# Altium PCB 800U R3N3_LED_V1.0.PcbDoc (part 1 of 2)
Units mm, origin at the board's own origin, x right, y up, seen from the top; angles counter-clockwise.
Board outline 308.48 x 220.22 mm, 4 copper layers (Top Layer, GND, Mid-Layer 2, Bottom Layer); 88 components, 70 nets, 229 pads, 84 vias.
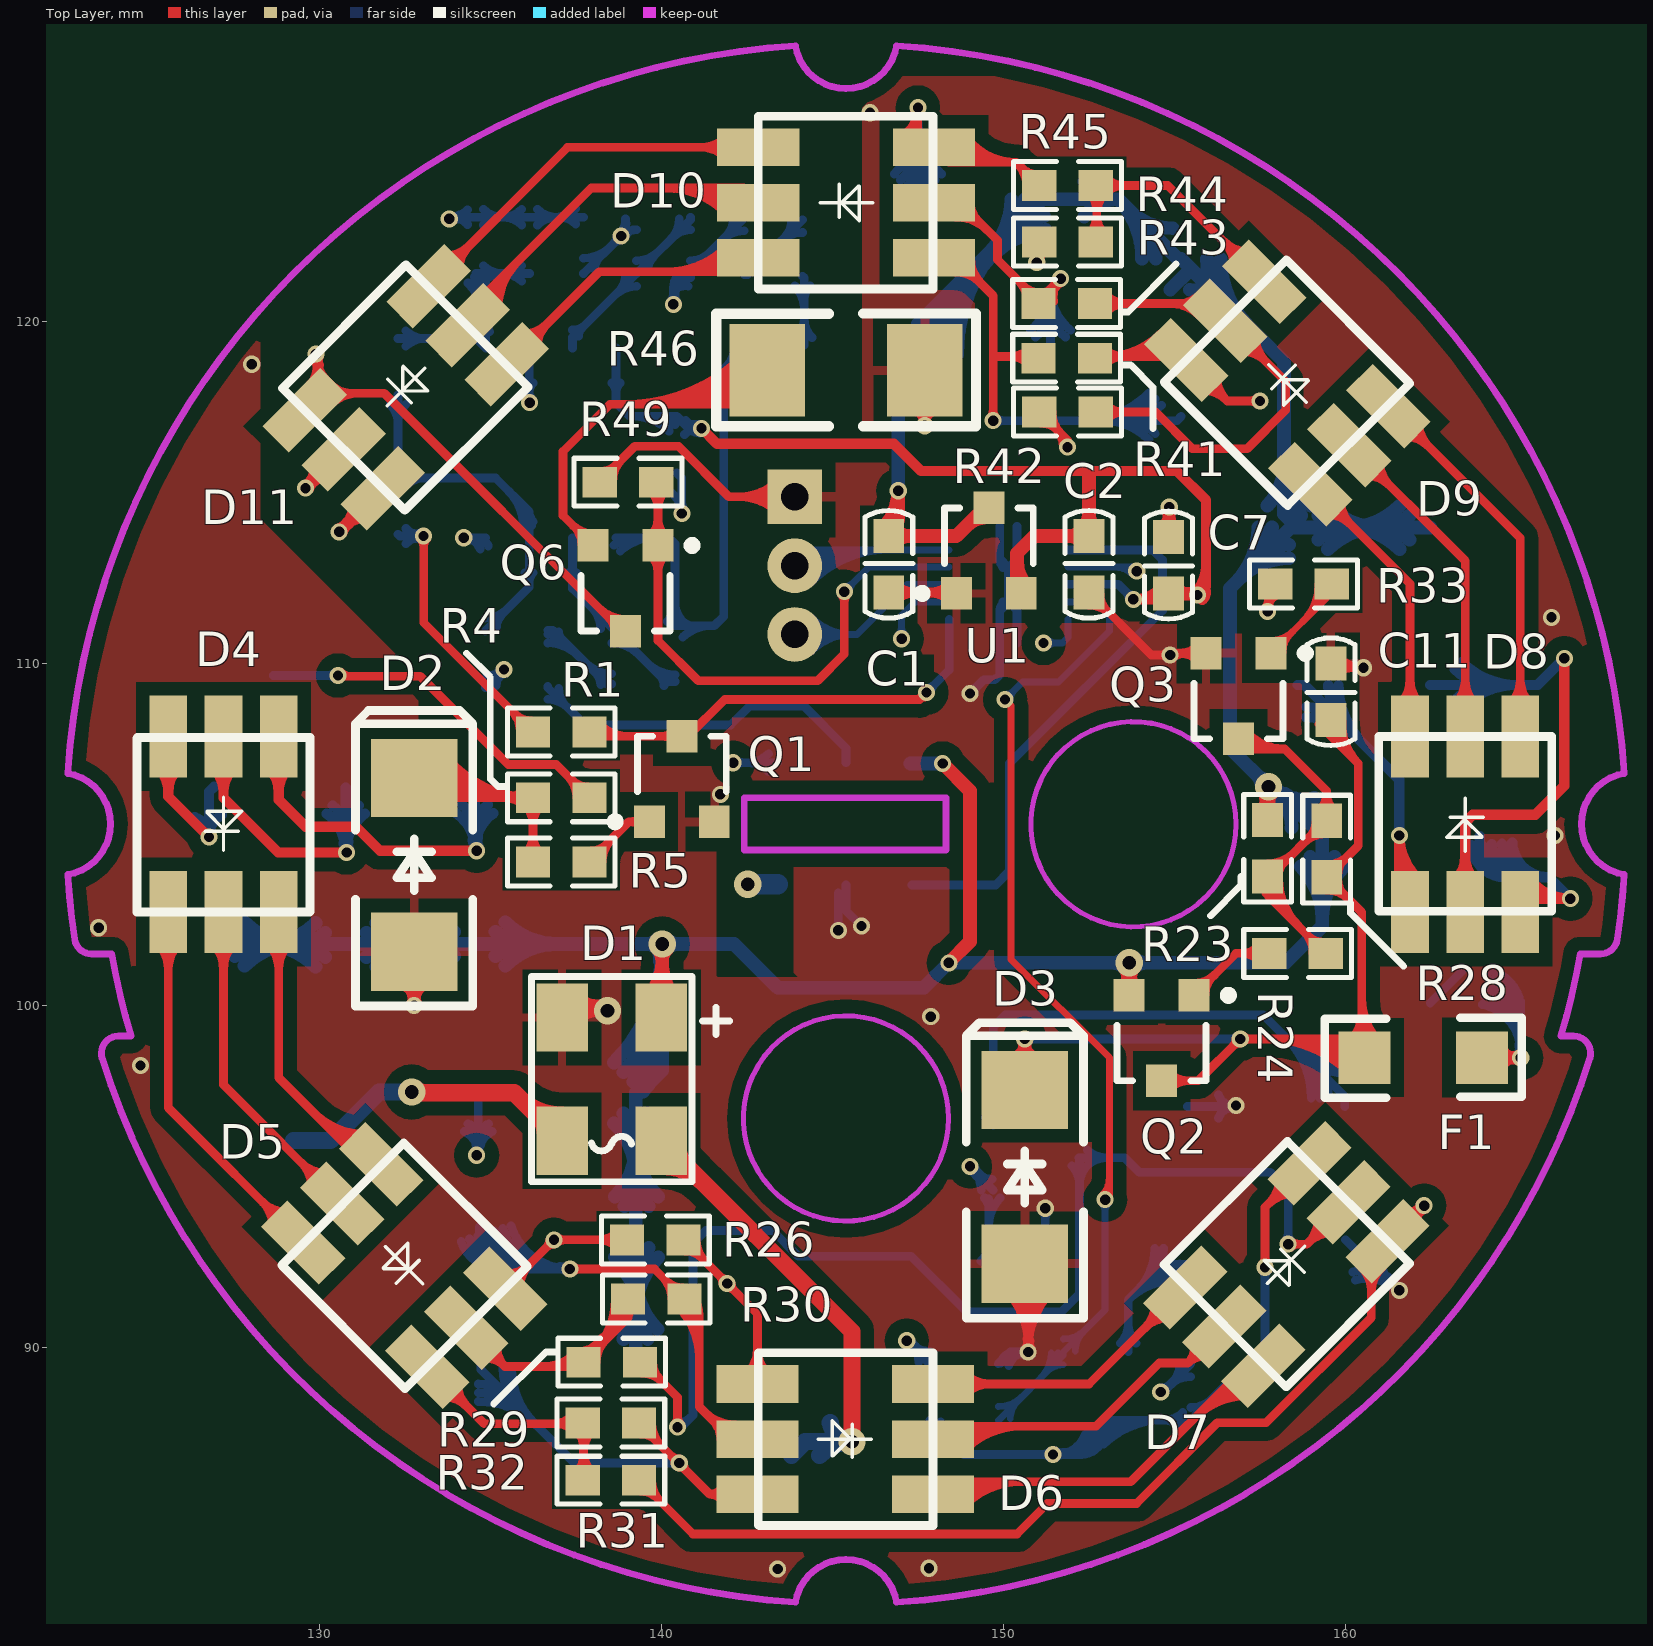
[diagram p0: Top Layer view]
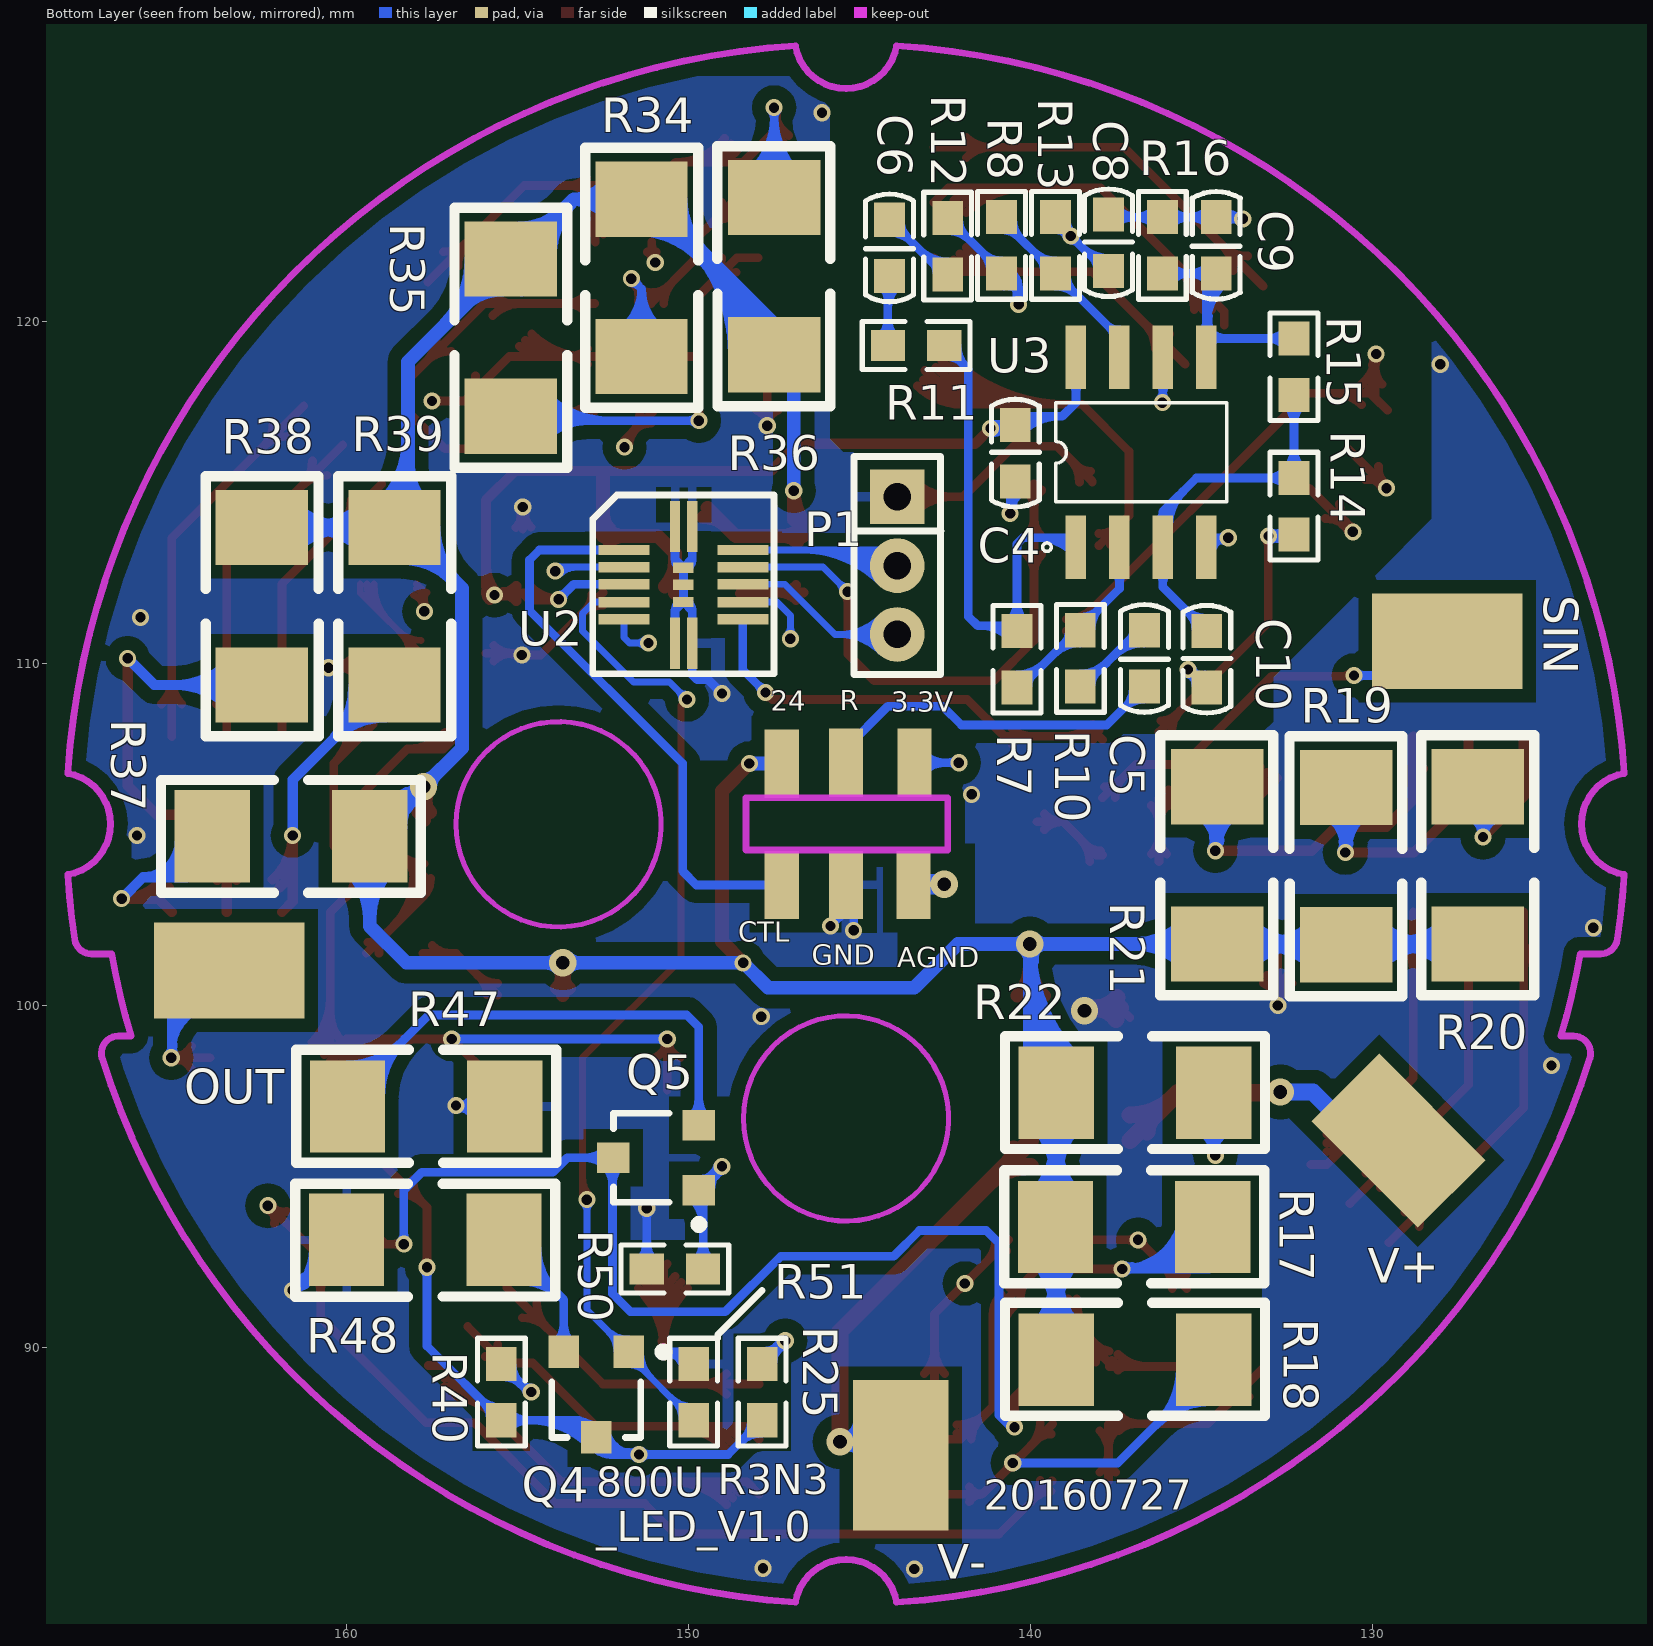
[diagram p1: Bottom Layer view, seen from below]
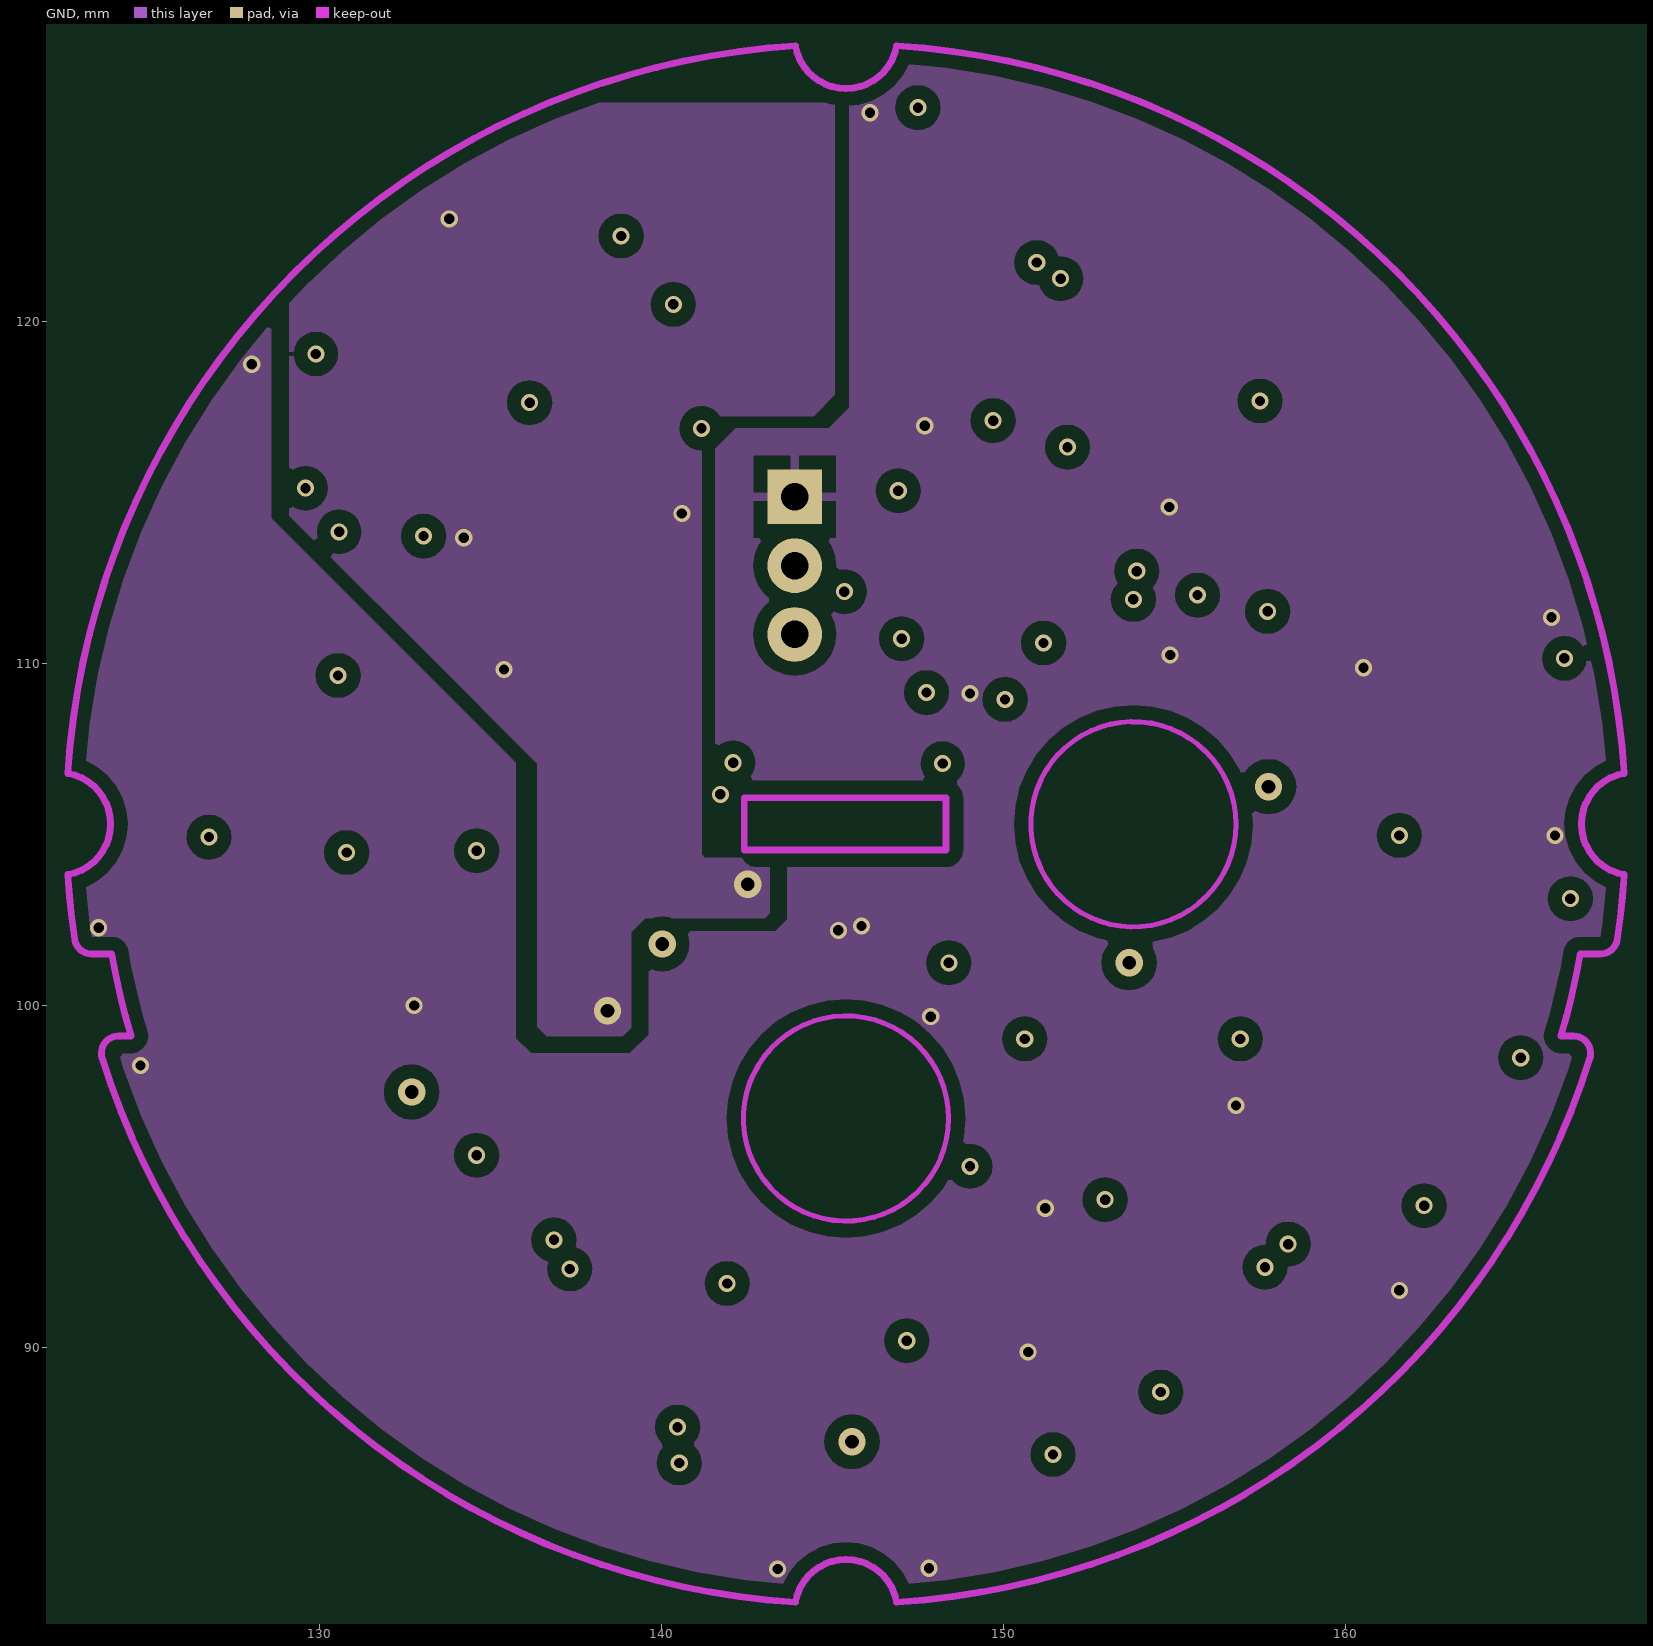
[diagram p2: GND]
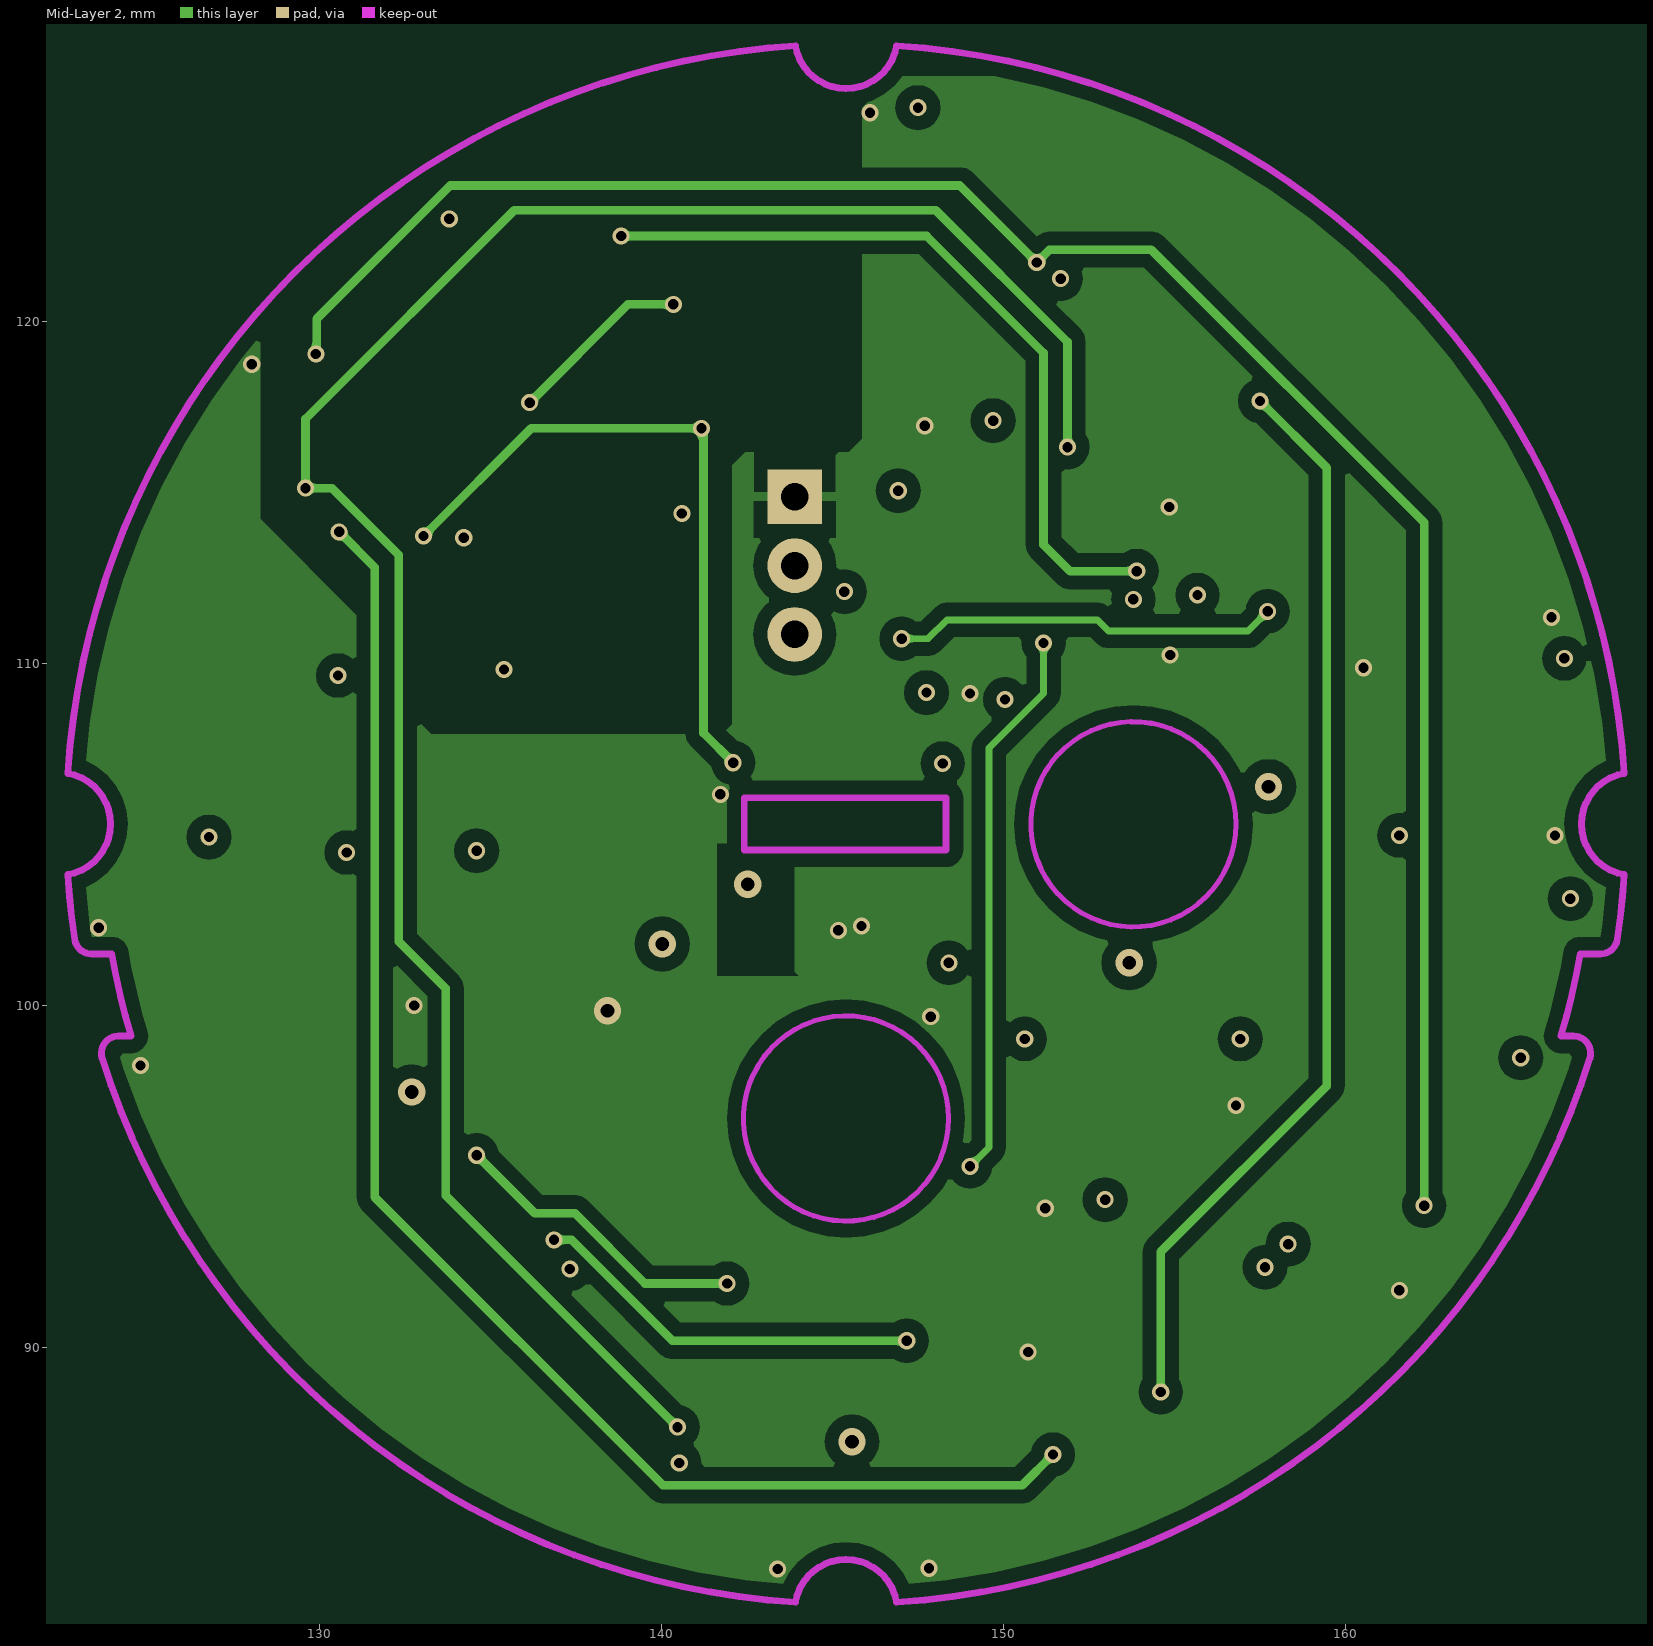
[diagram p3: Mid-Layer 2]

## Layer stack, top to bottom
Top Layer: signal copper 0.0356
Dielectric: core 0.32, FR-4, Dk 4.8
GND: signal copper 0.0356
Dielectric: prepreg 0.32, FR-4, Dk 4.8
Mid-Layer 2: signal copper 0.0356
Dielectric: core 0.32, FR-4, Dk 4.8
Bottom Layer: signal copper 0.0356

## Board outline
-7.366,215.265 301.117,215.265 301.117,-4.191 300.736,-4.572 -6.985,-4.572 -7.366,-4.953

## Design rules (kind name [scope] priority, off if disabled: settings)
Clearance Clearance_GND [InPolygon] p1: gap=0.4
Clearance Clearance_PAD [ISpad and incomponent('U2')] p2: gap=0.17
Clearance [All] p3: gap=0.2
PolygonConnect [ISvia] p1: connectstyle=Direct reliefconductorwidth=0.254 reliefentries=4 polygonreliefangle="90 Angle"
RoutingVias [All] p1: holewidth=0.3 width=0.5 viastyle="Through Hole" minholewidth=0.3 minwidth=0.5 maxholewidth=0.4 maxwidth=0.8
SilkscreenOverComponentPads [All] p1: minsilkscreentomaskgap=0.1
SolderMaskExpansion [All] p1: expansion=0.102
Width [All] p1: maxlimit=0.6 minlimit=0.2 preferedwidth=0.254 midlayer1_minwidth=0.254 midlayer1_maxwidth=0.254 midlayer2_prefwidth=0.2 minimp=50.000000 maximp=50.000000 favimp=50.000000
27 further rules are at their usual default settings.

## Components (designator, comment, footprint, x,y, rotation, side; value= is the part's Value field where it differs from the comment)
3.3V "" HOLE_SMD#1 143.4,107.1 r0 bottom
24 "" HOLE_SMD#1 147.275,107.075 r180 bottom (schematic designator 1)
AGND "" HOLE_SMD#1 143.425,103.525 r180 bottom (schematic designator GND)
C1 "1uF/50V" C0603 146.65,113.725 r270 top
C2 "1uF/50V" C0603 152.5,113.725 r270 top
C4 "C106" C0603 140.45,116.975 r270 bottom
C5 "C104" C0603 136.675,109.325 r90 bottom
C6 "C104" C0603 144.125,121.325 r90 bottom
C7 "105" C0603 154.825,112.05 r90 top
C8 "C104" C0603 137.725,123.125 r270 bottom
C9 "C104" C0603 134.575,121.4 r90 bottom
C10 "C104" C0603 134.85,110.95 r270 bottom
C11 "104" C0603 159.575,108.35 r90 top
CTL "" HOLE_SMD#1 147.275,103.525 r180 bottom (schematic designator LED_CTL)
D1 "LX10M" "桥堆 3.8*3.5" 138.55,97.85 r0 top
D2 "TVS36V" HSMA 132.775,101.575 r90 top
D3 "TVS36V" HSMA 150.625,92.45 r90 top
D4 "5050RGB" 5050RGB 127.2,105.3 r90 top
D5 "5050RGB" 5050RGB 132.481,92.4 r135 top
D6 "5050RGB" 5050RGB 145.375,87.325 r180 top
D7 "5050RGB" 5050RGB 158.275,92.431 r225 top
D8 "5050RGB" 5050RGB 163.5,105.3 r270 top
D9 "5050RGB" 5050RGB 158.3,118.2 r315 top
D10 "5050RGB" 5050RGB 145.4,123.475 r0 top
D11 "5050RGB" 5050RGB 132.525,118.075 r45 top
F1 "SMD1206P016" 1206 162.275,98.475 r0 top
GND "" HOLE_SMD#1 145.4,103.525 r180 bottom
OUT "" HOLE_SMD#2 163.425,101.025 r180 bottom
P1 "3P 2.0mm" SIP3 143.9,115.4 r0 bottom
Q1 "MMBT5551" SOT-23 140.6,106.625 r0 top
Q2 "S8550" SOT-23 154.625,99.05 r180 top
Q3 "贴片三极管" SOT-23 156.875,109.05 r180 top
Q4 "MMBT5551" SOT-23 152.7,88.625 r0 bottom
Q5 "MMBT5551" SOT-23 150.95,95.55 r90 bottom
Q6 "MMBT5551" SOT-23 138.95,112.2 r180 top
R "" HOLE_SMD#1 145.4,107.1 r180 bottom (schematic designator LED_R)
R1 "10K" R0603 137.9,108 r180 top
R4 "SMD1206P016" R0603 136.25,106.075 r0 top
R5 "10K" R0603 136.25,104.2 r0 top
R7 "" R0603 140.4,109.3 r90 bottom
R8 "" R0603 140.85,121.4 r90 bottom
R10 "" R0603 138.55,109.325 r90 bottom
R11 "" R0603 142.525,119.3 r0 bottom
R12 "" R0603 142.425,121.375 r90 bottom
R13 "" R0603 139.275,121.4 r90 bottom
R14 "" R0603 132.3,113.775 r90 bottom
R15 "" R0603 132.3,117.85 r90 bottom
R16 "" R0603 136.15,123.05 r270 bottom
R17 "" 2010 136.975,93.525 r180 bottom
R18 "" 2010 136.95,89.65 r180 bottom
R19 "300" 2010 130.775,104.075 r90 bottom
R20 "510" 2010 126.925,104.1 r90 bottom
R21 "300" 2010 134.55,104.1 r90 bottom
R22 "" 2010 136.95,97.45 r180 bottom
R23 "10K" R0603 157.725,103.775 r90 top
R24 "10K" R0603 159.425,101.525 r180 top
R25 "" R0603 147.85,89.525 r270 bottom
R26 "0R" R0603 139,93.15 r0 top
R28 "0R" R0603 159.45,105.4 r270 top
R29 "" R0603 137.725,89.575 r0 top
R30 "0R" R0603 139.025,91.425 r0 top
R31 "" R0603 137.7,86.125 r0 top
R32 "0R" R0603 137.7,87.8 r0 top
R33 "2K" R0603 159.6,112.325 r180 top
R34 "" 2010 151.375,121.275 r270 bottom
R35 "" 2010 155.2,119.525 r270 bottom
R36 "" 2010 147.5,121.325 r90 bottom
R37 "510" 2010 161.625,104.95 r0 bottom
R38 "300" 2010 162.475,111.675 r270 bottom
R39 "300" 2010 158.6,111.675 r270 bottom
R40 "" R0603 155.475,89.525 r270 bottom
R41 "0R" R0603 152.675,118.925 r180 top
R42 "" R0603 152.7,117.35 r180 top
R43 "0R" R0603 152.675,120.525 r180 top
R44 "" R0603 152.7,122.325 r180 top
R45 "0R" R0603 152.7,123.975 r180 top
R46 "150" 2010 145.4,118.575 r0 top
R47 "150" 2010 157.675,97.05 r180 bottom
R48 "150" 2010 157.7,93.15 r0 bottom
R49 "10K" R0603 139.85,115.3 r180 top
R50 "10K" R0603 149.575,92.3 r0 bottom
R51 "10K" R0603 149.85,87.875 r90 bottom
SIN "" HOLE_SMD#2 127.825,110.65 r180 bottom
U1 "Volt Reg" SOT-23 149.575,113.3 r0 top
U2 "C8051F300" QFN-11 150.15,112.3 r180 bottom locked
U3 "OPA2338" SO-8 138.675,113.4 r0 bottom
V+ "" HOLE_SMD#2 129.25,96.05 r45 bottom
V- "" HOLE_SMD#2 143.8,86.85 r270 bottom

## Footprints (in the part's own frame and the unit in brackets; to place one, negate y for a bottom-side part, rotate by r counter-clockwise, add the part's x,y. Pads: shape width x height; smd on the part's side, far side on the other; paste and mask are expansions set on the pad)
1206 [mil]
  rect 60x60 smd: 1(-67.5,0) 2(67.5,0)
  silkscreen extent -114,-46 114,46
2010 [mm]
  rect 2.2x2.7 smd: 1(-2.3,0) 2(2.3,0)
  silkscreen extent -3.8,-1.64 3.8,1.66
5050RGB [mm]
  rect 2.4x1.1 smd: 1(-2.565,1.613) 2(-2.565,0) 3(-2.565,-1.613) 4(2.565,-1.613) 5(2.565,0) 6(2.565,1.613)
  silkscreen extent -2.56,-2.53 2.54,2.53
C0603 [mm]
  rect 1x0.9 smd: 1(0,0) 2(1.65,0)
  silkscreen extent -0.75,-0.7 2.4,0.7
HOLE_SMD#1 [mm]
  rect 1x2 smd: 1(0,0)
HOLE_SMD#2 [mm]
  rect 4.4x2.8 smd: 1(0,0)
HSMA [mil]
  rect 90x100 smd: 1(0,0) 2(200,0)
  silkscreen extent -63,-68 278,68
QFN-11 [mm]
  rect 1.5x0.305 smd: 1(-1.737,1.018) 2(-1.737,0.518) 3(-1.737,0.018) 4(-1.737,-0.507) 5(-1.737,-1.007) 6(1.737,-1.007) 7(1.737,-0.507) 8(1.737,0.018) 9(1.737,0.518) 10(1.737,1.018)
  rect 0.305x1.5 smd: 11(-0.248,-1.705) 11(-0.248,1.705) 11(0.26,-1.705) 11(0.26,1.705)
  rect 0.6x0.3 smd: 11(0,-0.5) 11(0,0) 11(0,0.5)
  silkscreen extent -2.65,-2.6 2.65,2.63
R0603 [mm]
  rect 1x0.9 smd: 1(0,0) 2(1.65,0)
  silkscreen extent -0.75,-0.7 2.4,0.7
SIP3 [mm]
  rect 1.6x1.6 hole 0.8: 1(0,0.525)
  round 1.6 hole 0.8: 2(0,2.54) 3(0,4.55)
  silkscreen extent -1.28,-0.65 1.27,5.72
SO-8 [mm]
  rect 0.6x1.85 smd: 1(0,0) 2(-1.27,0) 3(-2.54,0) 4(-3.81,0) 5(-3.81,-5.55) 6(-2.54,-5.55) 7(-1.27,-5.55) 8(0,-5.55)
  silkscreen extent -4.41,-4.23 0.98,0.12
SOT-23 [mm] "SOT-23;"
  rect 0.9x0.95 smd: 1(-0.95,-1.25) 2(0.95,-1.25) 3(0,1.25)
  silkscreen extent -2.07,-1.37 1.3,1.25
"桥堆 3.8*3.5" [mm]
  rect 1.5x2 smd: 1(1.45,1.8) 2(1.45,-1.8) 3(-1.45,-1.8) 4(-1.45,1.8)
  silkscreen extent -2.35,-3 3.45,3

## Part data
3.3V 24 AGND CTL GND OUT R SIN V+ V-: library part 焊
C1 C2 C7 C11: library part Cap, "贴"
C4 C5 C6 C8 C9 C10: library part Cap, "Capacitor"
D2 D3: library part "D Schottky", "贴"
D4 D5 D6 D7 D8 D9 D10 D11: "贴"
F1 R4 R7 R8 R10 R11 R12 R13 R14 R15 R16: library part "Res Semi", "Semiconductor Resistor"
P1: library part MHDR1X3, "插"
Q1 Q4 Q5 Q6: library part NPN, "贴片NPN三极管"
Q2: "贴片PNP三极管"
Q3: library part NPN, "NPN三极管"
R1 R5 R17 R18 R19 R20 R21 R22 R23 R24 R25 R26 R28 R29 R30 R31 R32 R33 R34 R35 R36 R37 R38 R39 R40 R41 R42 R43 R44 R45 R46 R47 R48 R49 R50 R51: library part "Res Semi", "贴"
U1: "Voltage Regulator"
U3: library part LM833D, "Dual Low Noise, Audio Amplifier"

## Via types
v1: diameter 0.5, hole 0.3, Top Layer to Bottom Layer, 77 vias
v2: diameter 0.8, hole 0.4, Top Layer to Bottom Layer, 7 vias

## Nets (pads, with @x,y where several pads share a name; then routed paths per layer and width w, separated by ;. In a path a pad name is that pad's centre, name@x,y a point inside that pad or via, vN(x,y) a via of type N, cw(c..) or ccw(c..) an arc to the next point about the centre after c; other vN are vias at no path point)
3.3V: 3.3V.1 C2.1 C4.1 C7.1 R1.2 R14.1 U1.2 U2.3 U3.8 | length 82.2
  Top Layer w0.254: v1@132.963,113.638 cw(c132.753,113.428) 133.05,113.428 cw(c133.347,113.428) v1@133.137,113.638 ; v1(133.05,113.725) 133.05,111.2 R1.2@136.25,108 ; 135.613,108.637 cw(c134.977,108) R1.2@135.877,108 ; 135.734,108.516 ccw(c136.2,108.982) R1.2@136.2,108.323
  Top Layer w0.3: v1(141.175,116.875) 141.625,116.425 146.8,116.425 147.6,115.625 155.075,115.625 155.925,114.775 155.925,112.25 v1(155.675,112) 155.625,112.05 C7.1@154.825,112.05 154.65,111.875 v1(153.8,111.875) ccw(c153.8,113.023) C7.1@154.613,112.212 ; C7.1@155.037,111.838 cw(c155.549,111.326) 155.549,112.05 cw(c155.549,112.774) C7.1@155.037,112.262 ; 155.313,112.05 cw(c155.313,111.638) v1@155.604,111.929 ; 155.322,111.989 cw(c155.404,111.684) v1@155.61,111.924 ; 155.409,112.088 cw(c155.333,111.802) v1@155.588,111.95 ; v1@155.604,112.071 ccw(c154.83,112.845) 155.925,112.845 ; v1@155.816,111.859 ccw(c155.554,112.121) 155.925,112.121
  Top Layer w0.4: U1.2@150.4,112.05 150.4,113.225 150.9,113.725 C2.1@152.5,113.725 152.5,115.525 ; 150.4,112.98 ccw(c151.43,112.98) U1.2@150.702,112.252 ; C2.1@152.323,113.548 ccw(c151.896,113.121) 151.896,113.725 ccw(c151.896,114.329) C2.1@152.323,113.902 ; C2.1@152.323,113.952 ccw(c151.896,114.379) 152.5,114.379 ccw(c153.104,114.379) C2.1@152.677,113.952
  Mid-Layer 2 w0.254: v1(133.05,113.725) 136.2,116.875 v1(141.175,116.875) 141.231,116.819 141.231,107.969 v1(142.1,107.1) ; v1@133.05,113.848 ccw(c133.05,114.145) 133.26,113.935 ccw(c133.47,113.725) v1@133.173,113.725 ; v1@141.088,116.962 cw(c140.878,117.172) 140.878,116.875 cw(c140.878,116.578) 141.088,116.788 cw(c140.742,116.442) 141.231,116.442 ; v1@141.977,107.1 ccw(c141.68,107.1) 141.89,107.31 ccw(c142.1,107.52) v1@142.1,107.223
  Bottom Layer w0.25: U2.3@151.887,112.318 153.357,112.318 v1(153.8,111.875) ; v1@153.675,111.875 ccw(c153.373,111.875) 153.587,112.088 ccw(c153.8,112.302) v1@153.8,112
  Bottom Layer w0.254: R14.1@132.3,113.775 132.35,113.725 v1(133.05,113.725) ; R14.1@132.535,113.503 cw(c133.05,113.016) v1(133.05,113.725) ; R14.1@132.535,113.947 ccw(c133.05,114.434) v1(133.05,113.725) ; v1@132.943,113.664 ccw(c132.686,113.515) 132.763,113.802 ccw(c132.84,114.089) v1@132.989,113.832 ; v1@132.943,113.786 cw(c132.686,113.935) 132.763,113.648 cw(c132.84,113.361) v1@132.989,113.618 ; v1@132.963,113.638 ccw(c132.753,113.428) 132.753,113.725 ccw(c132.753,114.022) v1@132.963,113.812 ; U3.8@138.553,118.203 cw(c138.257,117.907) 138.675,117.907 cw(c139.093,117.907) U3.8@138.797,118.203 ; U3.8@138.675,119.225 138.675,117.625 139.075,117.225 C4.1@140.45,117.225 ; 139.187,117.225 cw(c139.187,115.762) C4.1@140.222,116.797 ; 139.801,117.225 cw(c139.801,116.376) C4.1@140.401,116.976 ; C4.1@140.678,116.697 cw(c141.109,116.266) v1@141.109,116.875 ; C4.1@140.713,117.113 ccw(c141.175,117.443) v1(141.175,116.875) 140.8,116.875 C4.1@140.45,117.225 ; C4.1@140.802,116.873 ccw(c141.124,117.195) v1@141.196,116.746 ; C4.1@140.844,116.804 cw(c140.936,116.461) v1@141.114,116.768 ; 140.924,116.825 ccw(c140.862,117.056) v1@141.068,116.937 ; v1@141.068,116.814 ccw(c140.816,116.671) 140.891,116.951 ccw(c140.966,117.231) v1@141.113,116.981 ; v1@141.088,116.788 ccw(c140.878,116.578) 140.878,116.875 ccw(c140.878,117.172) v1@141.088,116.962 ; v1@141.156,116.996 cw(c141.027,117.801) C4.1@140.45,117.225 ; v1(142.1,107.1) 3.3V.1@143.4,107.1 ; v1@142.187,107.013 cw(c142.397,106.803) 142.397,107.1 cw(c142.397,107.397) v1@142.187,107.187 ; 3.3V.1@143.136,106.836 ccw(c142.5,106.2) 142.5,107.1 ccw(c142.5,108) 3.3V.1@143.136,107.364
+24V: 24.1 C1.1 D1.1 Q2.2 R17.1 R18.1 R19.1 R20.1 R21.1 R22.1 R23.2 R34.1 R35.1 R36.1 R37.1 R38.1 R39.1 U1.3 | length 242.1
  Top Layer w0.4: D1.1@139.611,100.289 ccw(c138.612,101.288) 140.025,101.288 ; v2@139.884,101.659 cw(c139.542,101.317) 140.025,101.317 cw(c140.508,101.317) v2@140.166,101.659 ; D1.1@140,99.65 140.025,99.675 v2(140.025,101.8) ; 140.025,101.167 ccw(c141.267,101.167) D1.1@140.389,100.289 ; C1.1@146.473,113.952 ccw(c145.383,115.042) v1@146.925,115.042 ; C1.1@146.65,113.725 148.625,113.725 U1.3@149.45,114.55 ; C1.1@146.827,113.548 cw(c147.254,113.121) 147.254,113.725 cw(c147.254,114.329) C1.1@146.827,113.902 ; C1.1@146.925,114.2 v1(146.925,115.05) ; v1(148.225,107.075) 149.025,106.275 149.025,101.871 v1(148.404,101.25) ; 148.892,113.992 cw(c149.575,113.309) U1.3@149.575,114.275 ; Q2.2@153.498,100.502 ccw(c153.071,100.929) 153.675,100.929 ccw(c154.279,100.929) Q2.2@153.852,100.502 ; v2@153.534,101.109 cw(c153.192,100.767) 153.675,100.767 cw(c154.158,100.767) v2@153.816,101.109 ; v2@153.537,101.106 cw(c153.297,100.856) Q2.2@153.631,100.766 ; Q2.2@153.675,100.3 v2(153.675,101.25) ; Q2.2@153.719,100.766 cw(c154.053,100.856) v2@153.813,101.106 ; R23.2@157.548,105.652 ccw(c157.121,106.079) 157.725,106.079 ccw(c158.329,106.079) R23.2@157.902,105.652 ; v2@157.591,106.279 cw(c157.221,105.996) R23.2@157.671,105.876 ; v2@157.609,106.259 cw(c157.328,105.978) 157.725,105.978 ; R23.2@157.725,105.425 157.725,106.375 v2(157.75,106.4) ; R23.2@157.725,105.857 cw(c158.293,105.857) v2@157.891,106.259 ; 157.758,105.956 cw(c158.004,106.022) v2@157.862,106.234
  Bottom Layer w0.4: R20.1@126.925,101.8 R21.1@134.55,101.8 v2(140.025,101.8) ; R20.1@127.529,101.446 cw(c128.382,100.593) 128.382,101.8 cw(c128.382,103.007) R20.1@127.529,102.154 ; R20.1@127.811,101.164 cw(c129.348,99.627) 129.348,101.8 cw(c129.348,103.973) R20.1@127.811,102.436 ; 128.292,101.8 cw(c128.292,99.542) R19.1@129.889,101.139 ; 128.413,101.8 ccw(c128.413,103.887) R19.1@129.889,102.411 ; 129.258,101.8 cw(c129.258,100.508) R19.1@130.171,101.421 ; 129.378,101.8 ccw(c129.378,102.922) R19.1@130.171,102.129 ; R19.1@131.379,101.421 cw(c132.292,100.508) 132.292,101.8 ; R19.1@131.379,102.129 ccw(c132.172,102.922) 132.172,101.8 ; R19.1@131.661,101.139 cw(c133.258,99.542) R21.1@133.258,101.8 ; R19.1@131.661,102.411 ccw(c133.137,103.887) 133.137,101.8 ; R21.1@133.664,101.164 ccw(c132.127,99.627) 132.127,101.8 ccw(c132.127,103.973) R21.1@133.664,102.436 ; R21.1@133.946,101.446 ccw(c133.093,100.593) 133.093,101.8 ccw(c133.093,103.007) R21.1@133.946,102.154 ; R21.1@135.154,101.446 cw(c136.007,100.593) 136.007,101.8 cw(c136.007,103.007) R21.1@135.154,102.154 ; R21.1@135.436,101.164 cw(c136.973,99.627) 136.973,101.8 cw(c136.973,103.973) R21.1@135.436,102.436 ; R18.1@138.614,90.536 ccw(c137.077,92.073) 139.25,92.073 ccw(c141.423,92.073) R18.1@139.886,90.536 ; R22.1@138.614,96.564 cw(c137.077,95.027) 139.25,95.027 cw(c141.423,95.027) R22.1@139.886,96.564 ; R22.1@138.614,98.336 ccw(c135.206,101.744) v2@140.025,101.744 ; R17.1@138.639,92.639 cw(c137.163,91.163) 139.25,91.163 ; R17.1@138.639,94.411 ccw(c137.163,95.887) 139.25,95.887 ; R18.1@138.896,90.254 ccw(c138.043,91.107) 139.25,91.107 ccw(c140.457,91.107) R18.1@139.604,90.254 ; R22.1@138.896,96.846 cw(c138.043,95.993) 139.25,95.993 cw(c140.457,95.993) R22.1@139.604,96.846 ; R22.1@138.896,98.054 ccw(c136.172,100.778) 140.025,100.778 ; R17.1@138.921,92.921 cw(c138.128,92.128) 139.25,92.128 ; R17.1@138.921,94.129 ccw(c138.128,94.922) 139.25,94.922 ; R22.1@139.179,97.771 ccw(c137.138,99.812) 140.025,99.812 ; R18.1@139.25,89.725 R22.1@139.25,97.45 139.375,97.45 140.025,98.1 v2(140.025,101.8) ; 139.25,91.042 cw(c141.508,91.042) R17.1@139.911,92.639 ; 139.25,92.008 cw(c140.542,92.008) R17.1@139.629,92.921 ; 139.25,95.042 ccw(c140.542,95.042) R17.1@139.629,94.129 ; 139.25,96.008 ccw(c141.508,96.008) R17.1@139.911,94.411 ; R22.1@139.462,97.488 ccw(c138.103,98.847) 140.025,98.847 ; v2@139.863,101.683 cw(c139.446,101.383) 139.953,101.301 ; v2@139.884,101.941 cw(c139.542,102.283) 139.542,101.8 cw(c139.542,101.317) 139.884,101.659 cw(c139.542,101.317) 140.025,101.317 cw(c140.508,101.317) 140.166,101.659 cw(c140.508,101.317) 140.508,101.8 cw(c140.508,102.283) v2@140.166,101.941 ; 139.96,101.343 cw(c140.406,101.271) v2@140.142,101.638 ; v1(146.925,115.05) R36.1@146.925,118.45 ; 24.1@147.275,107.075 v1(148.225,107.075) ; R36.1@147.45,119.025 cw(c149.502,119.025) 148.051,120.476 ; R36.1@147.5,119.025 147.5,119.925 151.15,123.575 R34.1@151.375,123.575 153.35,123.575 ; R36.1@147.85,119.025 cw(c150.868,119.025) 148.734,121.159 ; R36.1@148.25,119.025 cw(c152.233,119.025) 149.417,121.842 ; R36.1@148.65,119.025 cw(c153.599,119.025) R34.1@150.1,122.525 ; 149.411,121.632 cw(c151.594,119.949) R34.1@151.24,122.682 ; 149.571,121.996 ccw(c147.992,123.575) R34.1@150.225,123.575 ; 149.631,122.056 cw(c151.125,120.563) R34.1@151.125,122.675 ; 149.915,122.285 ccw(c148.656,123.256) R34.1@150.232,123.46 ; 150.001,122.397 cw(c151.419,121.304) R34.1@151.189,123.079 ; R34.1@150.254,122.679 ccw(c149.358,123.575) R34.1@150.625,123.575 ; R34.1@150.314,122.739 cw(c151.125,121.928) R34.1@151.125,123.075 ; R34.1@152.363,123.06 cw(c153.35,122.372) 153.35,123.575 ; R34.1@152.363,124.09 ccw(c153.35,124.778) 153.35,123.575 ; v2@153.534,101.109 ccw(c153.192,100.767) 153.192,101.25 ccw(c153.192,101.733) v2@153.534,101.391 ; 153.67,123.255 ccw(c154.95,124.536) R35.1@154.95,122.725 ; v2@153.816,101.109 cw(c154.158,100.767) 154.158,101.25 cw(c154.158,101.733) v2@153.816,101.391 ; R35.1@154.016,122.909 cw(c152.967,121.86) R35.1@154.45,121.834 ; R35.1@154.05,121.841 ccw(c151.659,121.884) 153.35,123.575 ; R35.1@154.875,120.925 R35.1@155.487,121.537 ; R35.1@155.45,120.925 cw(c155.45,119.356) 156.56,120.465 ; R35.1@155.95,121.825 ccw(c157.761,121.825) 156.48,120.545 ; R35.1@156.35,121.825 ccw(c159.126,121.825) 157.163,119.862 ; 156.778,112.353 ccw(c155.156,113.975) R39.1@157.45,113.975 ; 156.899,112.474 cw(c158.35,111.023) R39.1@158.35,113.075 ; R39.1@157.461,113.036 ccw(c156.522,113.975) R39.1@157.85,113.975 ; v2@157.55,106.4 ccw(c157.067,106.4) 157.409,106.741 ccw(c157.75,107.083) v2@157.75,106.6 ; R39.1@157.582,113.157 cw(c158.35,112.389) R39.1@158.35,113.475 ; v2@157.698,106.207 cw(c157.448,105.274) R37.1@158.284,105.757 ; R39.1@157.714,114.611 ccw(c156.53,115.795) 158.204,115.795 ; v2@157.75,106.2 cw(c157.75,105.415) R37.1@158.305,105.97 ; v2@157.802,106.207 cw(c157.982,105.534) R37.1@158.33,106.137 ; v2@157.875,106.4 ccw(c158.772,107.297) R37.1@159.096,106.07 ; v2@157.965,106.31 cw(c156.856,105.2) R37.1@158.425,105.2 ; 158.204,115.535 ccw(c159.91,115.535) R39.1@158.704,114.329 ; 158.204,116.5 ccw(c160.875,116.5) R39.1@158.986,114.611 ; R37.1@158.367,105.908 ccw(c158.978,106.518) R37.1@159.198,105.683 ; R37.1@158.689,104.064 cw(c157.152,102.527) 159.325,102.527 cw(c161.498,102.527) R37.1@159.961,104.064 ; R37.1@158.971,104.346 cw(c158.118,103.493) 159.325,103.493 cw(c160.532,103.493) R37.1@159.679,104.346 ; R39.1@159.204,113.621 cw(c160.057,112.768) 160.057,113.975 cw(c160.057,115.182) R39.1@159.204,114.329 ; R39.1@159.486,113.339 cw(c161.023,111.802) 161.023,113.975 cw(c161.023,116.148) R39.1@159.486,114.611 ; R38.1@161.589,113.339 ccw(c160.052,111.802) 160.052,113.975 ccw(c160.052,116.148) R38.1@161.589,114.611 ; R38.1@161.871,113.621 ccw(c161.018,112.768) 161.018,113.975 ccw(c161.018,115.182) R38.1@161.871,114.329 ; R38.1@162.475,113.975 R39.1@158.6,113.975 ; v2(140.025,101.8) 142.125,101.8 143.4,100.525 147.679,100.525 v1(148.404,101.25) v2(153.675,101.25) 158.25,101.25 159.325,102.325 R37.1@159.325,104.95 157.875,106.4 v2(157.75,106.4) 156.625,107.525 156.625,112.2 158.4,113.975 R39.1@158.6,113.975 ; 153.35,123.575 155.1,121.825 R35.1@155.2,121.825 R35.1@155.488,121.538 ; R35.1@155.488,121.538 158.204,118.821 158.204,114.371 R39.1@158.6,113.975
ADCIN: R8.2 R13.1 U3.7 | length 9.6
  Bottom Layer w0.254: U3.7@137.405,119.225 137.405,119.53 R13.1@139.275,121.4 140.85,122.975 R8.2@140.85,123.05 ; U3.7@137.405,119.748 ccw(c137.405,120.274) 137.777,119.902 ; U3.7@137.578,119.575 cw(c137.887,119.575) U3.7@137.669,119.794 ; 138.638,120.763 cw(c139.275,120.127) R13.1@139.275,121.027 ; 138.759,120.884 ccw(c138.293,121.35) R13.1@138.952,121.35 ; R13.1@139.275,121.773 ccw(c139.275,122.673) 139.912,122.037 ; R13.1@139.598,121.45 cw(c140.257,121.45) 139.791,121.916 ; 140.281,122.406 ccw(c139.687,123) R8.2@140.527,123 ; 140.341,122.466 cw(c140.85,121.958) R8.2@140.85,122.677
ADCIN1: C8.2 R13.2 U2.2 | length 32.6
  Mid-Layer 2 w0.254: v1(138.825,122.5) 147.75,122.5 151.175,119.075 151.175,113.475 151.95,112.7 v1(153.9,112.7) ; v1@138.912,122.413 cw(c139.122,122.203) 139.122,122.5 cw(c139.122,122.797) v1@138.912,122.587 ; v1@153.813,112.613 ccw(c153.603,112.403) 153.603,112.7 ccw(c153.603,112.997) v1@153.813,112.787
  Bottom Layer w0.2: U2.2@151.887,112.818 v1@153.782,112.818 ; 153.252,112.818 cw(c153.252,112.052) v1@153.794,112.594
  Bottom Layer w0.254: C8.2@137.725,121.4 v1(138.825,122.5) ; C8.2@137.725,121.848 ccw(c137.725,122.93) 138.49,122.165 ; C8.2@138.048,121.525 cw(c138.526,121.525) 138.188,121.863 ; v1@138.688,122.363 ccw(c138.052,123) R13.2@138.952,123 ; v1@138.702,122.5 cw(c138.405,122.5) 138.615,122.29 cw(c138.825,122.08) v1@138.825,122.377 ; v1@138.809,122.484 cw(c139.275,122.018) R13.2@139.275,122.677 ; R13.2@138.907,122.742 ccw(c139.032,122.67) R13.2@138.92,122.578 ; R13.2@138.958,122.937 cw(c138.482,122.843) v1(138.825,122.5) ; R13.2@139.073,122.636 ccw(c139.211,122.396) 138.944,122.468 cw(c139.231,122.391) 139.082,122.648 cw(c138.934,122.906) 138.857,122.619 ccw(c138.939,122.925) R13.2@139.097,122.65 ; R13.2@139.267,122.677 ccw(c139.253,122.072) v1(138.825,122.5) ; v1@153.782,112.818 v1(153.9,112.7)
AGND: AGND.1
GND: C1.2 C2.2 C4.2 C7.2 C8.1 C9.2 C10.2 C11.2 D1.4 D2.1 D3.1 GND.1 P1.1 Q1.2 Q3.2 R16.1 R46.2 R47.2 R48.2 R49.2 R50.2 R51.2 U1.1 U2.11 U3.4 | length 107.5
  Top Layer w0.254: D2.1@132.356,100.649 cw(c132.062,100) v1(132.775,100) ; D2.1@132.461,100.881 cw(c132.24,100.394) 132.775,100.394 cw(c133.31,100.394) D2.1@133.089,100.881 ; v1@132.668,100.061 ccw(c132.411,100.21) 132.698,100.287 ccw(c132.985,100.364) v1@132.836,100.107 ; v1@132.688,100.087 ccw(c132.478,100.297) 132.775,100.297 ccw(c133.072,100.297) v1@132.862,100.087 ; v1@132.714,100.107 ccw(c132.565,100.364) 132.852,100.287 ccw(c133.139,100.21) v1@132.882,100.061 ; D2.1@132.775,101.575 v1(132.775,100) ; D2.1@133.194,100.649 ccw(c133.488,100) v1(132.775,100) ; D1.4@137.1,99.65 D1.4@137.375,99.925 ; R49.2@138.2,115.3 138.2,115.325 139.225,116.35 140.5,116.35 141.975,114.875 P1.1@143.9,114.875 ; R49.2@138.25,115.623 ccw(c138.25,116.222) 138.673,115.798 ; R49.2@138.573,115.3 cw(c139.534,115.3) 138.854,115.979 ; v1@140.563,114.35 v1(140.6,114.388) ; P1.1@143.424,114.399 ccw(c142.275,113.25) 142.275,114.875 ccw(c142.275,116.5) P1.1@143.424,115.351 ; P1.1@143.604,114.579 ccw(c142.888,113.863) 142.888,114.875 ccw(c142.888,115.887) P1.1@143.604,115.171 ; R46.2@147.376,117.407 cw(c147.215,116.95) v1(147.7,116.95) ; v1@147.602,117.024 ccw(c147.447,117.142) 147.635,117.193 ccw(c147.823,117.243) v1@147.748,117.063 ; v1@147.613,117.037 ccw(c147.403,117.247) 147.7,117.247 ccw(c147.997,117.247) v1@147.787,117.037 ; v1@147.652,117.063 ccw(c147.577,117.243) 147.765,117.193 ccw(c147.953,117.142) v1@147.798,117.024 ; R46.2@147.7,118.575 v1(147.7,116.95) ; R46.2@148.024,117.407 ccw(c148.185,116.95) v1(147.7,116.95) ; D3.1@150.034,91.732 cw(c148.364,90.062) v1@150.725,90.062 ; D3.1@150.213,91.911 cw(c148.978,90.676) 150.725,90.676 ; D3.1@150.393,92.091 cw(c149.591,91.289) 150.725,91.289 ; v1@150.624,89.945 ccw(c150.289,90.18) 150.692,90.251 ; D3.1@150.625,92.45 150.725,92.35 v1(150.725,89.875) ; v1@150.638,89.962 ccw(c150.428,90.172) 150.725,90.172 ccw(c151.022,90.172) v1@150.812,89.962 ; v1@150.656,89.977 ccw(c150.51,90.192) 150.765,90.143 ; v1@150.725,89.932 cw(c153.27,89.932) D3.1@151.47,91.732 ; 150.725,90.545 cw(c152.657,90.545) D3.1@151.291,91.911 ; 150.725,91.158 cw(c152.044,91.158) D3.1@151.111,92.091 ; 150.775,90.194 ccw(c151.103,90.131) v1@150.827,89.944 ; C2.2@152.5,111.702 cw(c152.5,110.802) 153.137,111.438 ; C2.2@152.5,112.075 154.325,110.25 v1(154.875,110.25) 154.925,110.3 Q3.2@155.925,110.3 ; C2.2@152.823,112.025 ccw(c153.482,112.025) 153.016,111.559 ; C7.2@154.6,113.981 ccw(c154.021,114.575) v1(154.85,114.575) ; v1@154.743,114.513 cw(c154.486,114.365) 154.773,114.288 cw(c155.06,114.211) v1@154.912,114.468 ; v1@154.763,114.488 cw(c154.553,114.278) 154.85,114.278 cw(c155.147,114.278) v1@154.937,114.488 ; v1@154.788,110.163 ccw(c154.578,109.953) 154.578,110.25 ccw(c154.578,110.547) v1@154.788,110.337 ; C7.2@154.85,113.925 v1(154.85,114.575) ; v1@154.85,114.469 ccw(c155.544,114.469) C7.2@155.053,113.978 ; 154.918,114.217 cw(c155.294,114.318) v1@154.957,114.514 ; v1@154.962,110.163 cw(c155.293,109.832) 155.293,110.3 ; Q3.2@155.697,110.072 ccw(c155.145,109.52) 155.145,110.3 ccw(c155.145,111.08) Q3.2@155.697,110.528 ; C11.2@159.575,109.875 v1(160.525,109.875) cw(c160.525,110.885) C11.2@159.805,110.177 ; C11.2@159.803,109.722 cw(c160.174,109.351) 160.174,109.875 ; v1@160.418,109.814 ccw(c160.161,109.665) 160.238,109.952 ccw(c160.315,110.239) v1@160.464,109.982 ; v1@160.438,109.788 ccw(c160.228,109.578) 160.228,109.875 ccw(c160.228,110.172) v1@160.438,109.962
  Top Layer w0.3: C1.2@146.65,112.075 148.475,112.075 U1.1@148.5,112.05 ; C1.2@146.862,111.863 cw(c147.374,111.351) 147.374,112.075 cw(c147.374,112.799) C1.2@146.862,112.287 ; U1.1@148.413,111.863 ccw(c147.901,111.351) 147.901,112.075 ccw(c147.901,112.799) U1.1@148.413,112.287
  Top Layer w0.5: D1.4@137.375,99.925 v2@138.15,99.925 ; D1.4@137.476,100.23 ccw(c138.15,100.823) 138.15,99.925 ccw(c138.15,99.113) D1.4@137.5,99.6
  Bottom Layer w0.254: v1(133.8,123) v1@133.85,123.05 ; v1@133.887,122.913 cw(c134.218,122.582) C9.2@134.218,123.05 ; v1@133.9,122.928 cw(c134.032,122.833) 134.074,122.99 ; v1@133.907,122.939 cw(c134.268,122.73) C9.2@134.16,123.133 ; v1@134.296,113.574 cw(c134.422,113.395) 134.479,113.607 cw(c134.536,113.819) v1@134.337,113.727 ; v1@134.312,113.588 cw(c134.522,113.378) 134.522,113.675 cw(c134.522,113.972) v1@134.312,113.762 ; C9.2@134.335,122.834 ccw(c133.85,122.398) v1@133.85,123.05 ; C9.2@134.335,123.266 cw(c133.85,123.702) v1@133.85,123.05 ; U3.4@134.588,113.675 cw(c134.588,113.299) U3.4@134.941,113.428 ; U3.4@134.702,113.341 ccw(c134.225,113.167) v1(134.225,113.675) U3.4@134.865,113.675 ; C9.2@134.803,122.822 cw(c135.355,122.27) 135.355,123.05 cw(c135.355,123.83) C9.2@134.803,123.278 ; C10.2@134.85,109.3 134.875,109.3 v1(135.4,109.825) cw(c135.002,110.223) C10.2@134.905,109.668 ; C10.2@135.173,109.35 cw(c135.772,109.35) v1@135.348,109.773 ; C10.2@135.212,109.538 cw(c135.525,109.357) v1@135.432,109.706 ; C10.2@135.258,109.617 ccw(c135.057,109.733) C10.2@135.281,109.793 ; v1@135.277,109.825 cw(c134.98,109.825) 135.19,109.615 cw(c135.4,109.405) v1@135.4,109.702 ; v1@135.281,109.855 cw(c135.005,109.925) 135.147,109.679 cw(c135.29,109.433) v1@135.367,109.707 ; R16.1@135.922,122.822 ccw(c135.37,122.27) 135.37,123.05 ccw(c135.37,123.83) R16.1@135.922,123.278 ; R16.1@136.378,122.822 cw(c136.93,122.27) 136.93,123.05 cw(c136.93,123.83) R16.1@136.378,123.278 ; 136.885,123.05 ccw(c136.885,123.915) C8.1@137.497,123.303 ; 137.006,123.05 cw(c137.006,122.356) C8.1@137.497,122.847 ; C8.1@137.725,123.05 C9.2@134.575,123.05 v1@133.85,123.05 ; C4.2@140.267,115.009 cw(c139.831,114.375) v1@140.6,114.375 ; C4.2@140.45,115.575 140.6,115.425 v1@140.6,114.388 ; v1@140.494,114.449 ccw(c140.247,114.592) 140.522,114.665 ; v1@140.513,114.474 ccw(c140.304,114.684) 140.6,114.684 ; 140.518,114.681 ccw(c140.816,114.761) v1@140.662,114.494 ; 140.6,114.685 ccw(c140.898,114.685) v1@140.687,114.474 ; v1(145.175,102.2) GND.1@145.175,103.3 ; GND.1@145.4,103.525 145.4,102.775 v1(145.85,102.325) ; v1(149.025,109.125) 149.425,109.525 149.75,109.525 149.889,109.664 U2.11@149.889,110.595 149.889,111.54 ; v1@149.025,109.248 ccw(c149.025,109.545) 149.235,109.335 ccw(c149.445,109.125) v1@149.148,109.125 ; R51.2@149.85,89.525 150.2,89.875 v1(150.725,89.875) ccw(c150.725,89.272) R51.2@150.155,89.469 ; 149.889,111.478 cw(c150.322,111.478) U2.11@150.016,111.784 ; 149.889,111.517 cw(c150.233,111.517) U2.11@150.015,111.782 ; 149.889,113.122 ccw(c150.322,113.122) U2.11@150.016,112.816 ; U2.11@149.889,114.005 149.889,113.06 ; R51.2@149.915,89.552 cw(c150.368,89.396) 150.368,89.875 ; U2.11@149.977,111.797 cw(c149.672,111.757) 149.89,111.54 ; U2.11@149.977,112.803 ccw(c149.672,112.843) 149.89,113.06 ; U2.11@150.013,112.819 cw(c150.187,113.06) 149.889,113.06 ; U2.11@150.284,111.784 cw(c150.009,111.509) 150.397,111.509 ; U2.11@150.284,112.816 ccw(c150.009,113.091) 150.397,113.091 ; U2.11@150.285,111.783 cw(c150.067,111.534) 150.397,111.534 ; U2.11@150.286,112.818 ccw(c150.106,113.047) 150.397,113.047 ; U2.11@150.323,111.796 ccw(c150.59,111.745) 150.397,111.553 ; U2.11@150.323,112.804 cw(c150.59,112.855) 150.397,113.047 ; U2.11@150.397,110.595 150.397,111.552 ; U2.11@150.397,114.005 150.397,113.047 ; v1@150.618,89.936 cw(c150.361,90.085) 150.438,89.798 cw(c150.515,89.511) v1@150.663,89.768 ; v1@150.638,89.788 ccw(c150.428,89.578) 150.428,89.875 ccw(c150.428,90.172) v1@150.638,89.962 ; R50.2@150.997,92.528 ccw(c150.445,93.08) 151.225,93.08 ccw(c152.005,93.08) R50.2@151.453,92.528 ; v1@151.138,93.988 cw(c150.928,93.778) 151.225,93.778 cw(c151.522,93.778) v1@151.312,93.988 ; R50.2@151.225,92.3 v1(151.225,94.075) ; R47.2@155.375,97.05 v1@156.775,97.05 ; R47.2@156.287,96.711 cw(c156.775,96.529) v1@156.775,97.05 ; R47.2@156.287,97.389 ccw(c156.775,97.571) v1@156.775,97.05 ; R47.2@156.443,97.05 ccw(c156.443,97.432) v1@156.713,97.162 ; 156.485,96.972 ccw(c156.398,97.297) v1@156.692,97.134 ; 156.559,96.992 cw(c156.62,96.764) v1@156.738,96.968 ; v1(156.8,97.075) v1@156.775,97.05 ; R48.2@160,93.15 v1@161.475,91.675 ; R48.2@160.212,92.213 cw(c160.495,91.292) 161.177,91.973 ; R48.2@160.286,91.97 cw(c160.636,90.836) v1@161.475,91.675 ; R48.2@160.719,92.896 ccw(c161.83,92.891) R48.2@161.044,92.106 ; R48.2@160.973,92.895 ccw(c162.687,92.887) v1@161.475,91.675 ; 161.188,91.841 ccw(c161.422,92.245) v1@161.543,91.794 ; 161.194,91.956 ccw(c161.575,92.336) v1@161.575,91.798 ; 161.247,92.07 ccw(c161.76,92.366) v1@161.607,91.794 ; v1(161.575,91.675) v1@161.475,91.675 ; 149.889,111.54 U2.11@150.15,111.8 ; 149.889,113.06 U2.11@150.15,112.8 ; U2.11@150.15,111.8 U2.11@150.15,112.8 ; U2.11@150.15,111.8 150.397,111.552 ; U2.11@150.15,112.8 150.397,113.047
  other v1: 143.4,83.525 147.825,83.55 124.775,98.25 147.875,99.675 123.55,102.275 166.125,104.975 141.725,106.175 166.025,111.35 128.025,118.75 146.1,126.1
  other v2: 138.425,99.85 142.525,103.55
INPUT: Q1.3 R1.1 U2.6 | length 16.7
  Top Layer w0.254: R1.1@137.9,107.775 138,107.875 140.775,107.875 141.85,108.95 147.55,108.95 v1(147.75,109.15) ; R1.1@137.999,108.049 ccw(c138.418,108.468) 138.418,107.875 ; R1.1@138.178,107.772 cw(c138.428,107.522) 138.428,107.875 ; R1.1@138.178,108.228 ccw(c139.032,109.082) 139.032,107.875 ; Q1.3@140.547,107.647 ccw(c139.995,107.095) 139.995,107.875 ccw(c139.995,108.655) Q1.3@140.547,108.103 ; v1@147.627,109.15 cw(c147.33,109.15) 147.54,108.94 cw(c147.75,108.73) v1@147.75,109.027
  Bottom Layer w0.254: v1(147.75,109.15) 148.412,109.813 U2.6@148.412,111.293 ; v1@147.75,109.273 ccw(c147.75,109.57) 147.96,109.36 ccw(c148.17,109.15) v1@147.873,109.15
LED_B: Q4.1 R51.1 U2.4 | length 35.6
  Top Layer w0.2: v1(150.05,108.95) 150.225,108.775 150.225,101.35 153.1,98.475 153.1,94.45 v1(152.975,94.325) ; v1@152.869,94.431 ccw(c152.311,94.989) 153.1,94.989
  Bottom Layer w0.2: R51.1@149.85,87.875 151.75,89.775 Q4.1@151.75,89.875 152.975,91.1 v1(152.975,94.325) ; R51.1@149.85,88.275 ccw(c149.85,89.241) 150.533,88.558 ; v1(150.05,108.95) 150.563,109.463 151.614,109.463 153.1,110.95 153.1,111.458 152.764,111.793 U2.4@151.887,111.793 ; v1@150.05,109.1 ccw(c150.05,109.462) 150.306,109.206 ccw(c150.562,108.95) v1@150.2,108.95 ; R51.1@150.2,87.925 cw(c150.924,87.925) 150.412,88.437 ; 151.099,89.124 ccw(c150.374,89.85) Q4.1@151.4,89.85 ; 151.281,89.306 cw(c151.75,88.836) Q4.1@151.75,89.5 ; Q4.1@151.441,89.466 ccw(c151.057,89.85) Q4.1@151.6,89.85 ; Q4.1@151.75,90.25 ccw(c151.75,91.155) 152.39,90.515 ; Q4.1@152.1,89.9 cw(c152.885,89.9) 152.33,90.455 ; v1@152.869,94.219 cw(c152.613,93.963) 152.975,93.963 cw(c153.337,93.963) v1@153.081,94.219
LED_G: Q5.1 R50.1 U2.5 | length 27.3
  Mid-Layer 2 w0.2: v1(149.025,95.3) 149.575,95.85 149.575,107.525 151.175,109.125 v1(151.175,110.6) ; v1@149.025,95.45 ccw(c149.025,95.812) 149.281,95.556 ccw(c149.537,95.3) v1@149.175,95.3 ; v1@151.069,110.494 cw(c150.813,110.238) 151.175,110.238 cw(c151.537,110.238) v1@151.281,110.494
  Bottom Layer w0.2: v1(151.175,110.6) 151.725,110.6 151.887,110.762 U2.5@151.887,111.293 ; v1@151.281,110.494 cw(c151.537,110.238) 151.537,110.6 cw(c151.537,110.962) v1@151.281,110.706
  Bottom Layer w0.254: v1@148.993,95.181 cw(c148.901,94.838) 149.209,95.016 ; v1@149.025,95.177 cw(c149.025,94.94) 149.192,95.108 ; v1(149.025,95.3) 149.025,95.275 Q5.1@149.7,94.6 ; v1@149.106,95.194 cw(c148.512,94.6) Q5.1@149.352,94.6 ; v1@149.144,95.268 ccw(c149.374,95.206) 149.168,95.087 ; v1@149.144,95.332 ccw(c149.673,95.474) Q5.1@149.399,94.999 ; v1@149.148,95.3 ccw(c149.505,95.3) Q5.1@149.253,95.047 ; v1@149.166,95.134 ccw(c149.675,95.642) Q5.1@149.675,94.923 ; R50.1@149.347,92.528 ccw(c148.795,93.08) 149.575,93.08 ccw(c150.355,93.08) R50.1@149.803,92.528 ; Q5.1@149.447,94.372 cw(c149.137,94.062) 149.575,94.062 ; R50.1@149.575,92.3 Q5.1@149.575,94.35 ; 149.575,93.579 cw(c150.696,93.579) Q5.1@149.903,94.372
LED_R: Q6.1 R49.1 U2.9 | length 20.7
  Top Layer w0.254: Q6.1@139.672,113.197 cw(c139.12,112.645) 139.9,112.645 cw(c140.68,112.645) Q6.1@140.128,113.197 ; Q6.1@139.672,113.703 ccw(c139.12,114.255) 139.9,114.255 ccw(c140.68,114.255) Q6.1@140.128,113.703 ; R49.1@139.672,115.072 cw(c139.12,114.52) 139.9,114.52 cw(c140.68,114.52) R49.1@140.128,115.072 ; R49.1@139.9,115.25 Q6.1@139.9,113.45 139.9,110.675 141.075,109.5 144.575,109.5 145.35,110.275 v1(145.35,112.1) ; v1@145.263,112.013 cw(c145.053,111.803) 145.35,111.803 cw(c145.647,111.803) v1@145.437,112.013
  Bottom Layer w0.2: v1(145.35,112.1) 146.068,112.818 U2.9@148.412,112.818 ; v1@145.35,112.25 ccw(c145.35,112.612) 145.606,112.356 ccw(c145.862,112.1) v1@145.5,112.1
LEDCTL: CTL.1 U2.1 | length 16.9
  Bottom Layer w0.254: CTL.1@147.325,103.525 149.775,103.525 150.175,103.925 150.175,107.075 154.65,111.55 154.65,113.025 154.357,113.318 U2.1@151.887,113.318
NetC5_1: C5.1 R.1 | length 11.6
  Bottom Layer w0.254: C5.1@136.675,108.952 cw(c136.675,108.112) 137.269,108.706 ; C5.1@136.675,109.325 136.675,109.3 137.775,108.2 142.025,108.2 142.575,108.75 144.175,108.75 145.4,107.525 R.1@145.4,107.1 ; C5.1@136.998,109.275 ccw(c137.717,109.275) 137.209,108.766
NetC5_2: C5.2 R10.1 | length 5.5
  Bottom Layer w0.254: C5.2@136.675,110.602 cw(c136.675,109.339) 137.568,110.232 ; C5.2@136.675,110.856 cw(c136.675,110.207) 137.134,110.666 ; C5.2@136.675,110.975 136.825,110.975 138.4,109.4 R10.1@138.55,109.4 ; C5.2@136.998,110.925 ccw(c137.295,110.925) C5.2@137.085,110.715 ; 137.785,110.015 ccw(c138.55,110.78) R10.1@138.55,109.698 ; 138.087,109.713 cw(c137.749,109.375) R10.1@138.227,109.375
NetC6_1: C6.1 R11.2 | length 4.5
  Bottom Layer w0.254: C6.1@143.897,121.047 cw(c143.225,120.375) 144.175,120.375 ; R11.2@143.947,119.528 ccw(c143.395,120.08) 144.175,120.08 ccw(c144.955,120.08) R11.2@144.403,119.528 ; C6.1@144.125,121.325 144.175,121.275 R11.2@144.175,119.3 ; 144.175,120.616 cw(c144.784,120.616) C6.1@144.353,121.047
NetC6_2: C6.2 R12.1 | length 4.8
  Bottom Layer w0.254: R12.1@142.425,121.375 142.525,121.375 C6.2@144.125,122.975 ; R12.1@142.425,121.748 ccw(c142.425,122.89) 143.232,122.082 ; R12.1@142.748,121.425 cw(c143.166,121.425) R12.1@142.87,121.72 ; 143.488,122.338 cw(c144.125,121.702) C6.2@144.125,122.602 ; 143.609,122.459 ccw(c143.143,122.925) C6.2@143.802,122.925
NetC9_1: C9.1 R15.2 R16.2 U3.5 | length 14.3
  Bottom Layer w0.254: R15.2@132.3,119.5 134.59,119.5 134.865,119.225 134.865,121.285 134.75,121.4 C9.1@134.575,121.4 R16.2@136.15,121.4 ; R15.2@132.528,119.272 cw(c133.08,118.72) 133.08,119.5 cw(c133.08,120.28) R15.2@132.528,119.728 ; 134.266,119.5 ccw(c134.266,120.174) 134.743,119.697 ccw(c134.447,119.993) 134.865,119.993 ccw(c135.283,119.993) U3.5@134.987,119.697 ; C9.1@134.347,121.122 cw(c133.095,119.87) U3.5@134.865,119.87 ; C9.1@134.526,121.301 cw(c133.708,120.483) 134.865,120.483 ; U3.5@134.719,119.668 ccw(c134.183,120.009) 134.803,120.147 ; C9.1@134.803,121.172 cw(c135.355,120.62) 135.355,121.4 cw(c135.355,122.18) C9.1@134.803,121.628 ; R16.2@135.922,121.172 ccw(c135.37,120.62) 135.37,121.4 ccw(c135.37,122.18) R16.2@135.922,121.628
NetC10_1: C10.1 R14.2 R15.1 U3.3 | length 18.6
  Bottom Layer w0.254: R14.2@132.072,115.703 ccw(c131.52,116.255) 132.3,116.255 ccw(c133.08,116.255) R14.2@132.528,115.703 ; R15.1@132.072,117.572 cw(c131.52,117.02) 132.3,117.02 cw(c133.08,117.02) R15.1@132.528,117.572 ; R15.1@132.3,117.85 R14.2@132.3,115.425 135.15,115.425 136.135,114.44 ; R14.2@132.528,115.197 cw(c133.08,114.645) 133.08,115.425 cw(c133.08,116.205) R14.2@132.528,115.653 ; C10.1@134.85,110.95 136.135,112.235 136.135,113.675 136.135,114.44 ; C10.1@134.85,111.323 ccw(c134.85,112.223) 135.487,111.587 ; C10.1@135.173,111 cw(c135.832,111) 135.366,111.466 ; 135.546,115.029 cw(c134.542,114.025) U3.3@135.962,114.025 ; 135.98,114.595 cw(c135.41,114.025) U3.3@136.216,114.025 ; U3.3@136.013,112.653 cw(c135.717,112.357) 136.135,112.357 cw(c136.553,112.357) U3.3@136.257,112.653 ; U3.3@136.013,114.148 ccw(c135.724,114.44) 136.135,114.44 ; U3.3@136.257,114.148 cw(c136.546,114.44) 136.135,114.44
NetC11_1: C11.1 D3.2 F1.1 Q2.3 R28.2 | length 46.4
  Top Layer w0.254: D3.2@150.251,98.475 ccw(c150.033,99.025) v1(150.625,99.025) ; v1@150.518,98.963 cw(c150.261,98.815) 150.548,98.738 cw(c150.835,98.661) v1@150.686,98.918 ; v1@150.538,98.938 cw(c150.328,98.728) 150.625,98.728 cw(c150.922,98.728) v1@150.712,98.938 ; v1@150.564,98.918 cw(c150.415,98.661) 150.702,98.738 cw(c150.989,98.815) v1@150.732,98.963 ; D3.2@150.625,97.53 v1(150.625,99.025) ; D3.2@150.999,98.475 cw(c151.217,99.025) v1(150.625,99.025) ; Q2.3@154.625,97.8 155.7,97.8 v1(156.925,99.025) F1.1@160.011,99.025 ; Q2.3@154.853,97.572 cw(c155.405,97.02) 155.405,97.8 cw(c155.405,98.58) Q2.3@154.853,98.028 ; v1@156.802,99.025 cw(c156.505,99.025) 156.715,98.815 cw(c156.925,98.605) v1@156.925,98.902 ; v1@157.012,98.938 cw(c157.222,98.728) 157.222,99.025 cw(c157.222,99.322) v1@157.012,99.112 ; 157.7,99.025 cw(c157.7,95.614) F1.1@160.111,98.026 ; 158.313,99.025 cw(c158.313,96.227) F1.1@160.291,98.206 ; 158.926,99.025 cw(c158.926,96.841) F1.1@160.471,98.385 ; C11.1@159.225,108.225 160.375,107.075 160.375,104.675 R28.2@159.45,103.75 160.475,102.725 F1.1@160.475,98.56 ; R28.2@159.45,103.377 cw(c159.45,102.477) 160.087,103.113 ; R28.2@159.45,104.123 ccw(c159.45,105.023) 160.087,104.387 ; 159.539,99.025 cw(c159.539,97.454) F1.1@160.65,98.565 ; C11.1@159.644,108.298 ccw(c160.733,108.258) 159.963,107.487 ; R28.2@159.773,103.7 ccw(c160.432,103.7) 159.966,103.234 ; R28.2@159.773,103.8 cw(c160.432,103.8) 159.966,104.266 ; C11.1@159.898,108.288 ccw(c161.529,108.23) 160.375,107.075 ; F1.1@160.111,98.924 ccw(c159.234,99.802) 160.475,99.802 ; 160.475,99.601 ccw(c161.687,99.601) F1.1@160.83,98.744 ; 160.475,100.214 ccw(c162.3,100.214) F1.1@161.01,98.924
  Bottom Layer w0.254: v1(150.625,99.025) v1(156.925,99.025) ; v1@150.712,98.938 cw(c150.922,98.728) 150.922,99.025 cw(c150.922,99.322) v1@150.712,99.112 ; v1@156.838,98.938 ccw(c156.628,98.728) 156.628,99.025 ccw(c156.628,99.322) v1@156.838,99.112
NetD1_2: D1.2 V-.1 | length 16.9
  Top Layer w0.5: D1.2@140,95.3 cw(c140,93.489) 141.28,94.77 ; D1.2@140,96.05 145.575,90.475 v2(145.575,87.25) ; D1.2@140.5,95.8 ccw(c141.104,95.8) D1.2@140.677,95.373
  Bottom Layer w0.5: V-.1@143.8,86.85 144.2,87.25 v2(145.575,87.25) ; V-.1@144.625,86.848 cw(c145.575,85.925) v2(145.575,87.25) ; V-.1@144.94,87.805 ccw(c145.575,87.891) v2(145.575,87.25)
NetD1_3: D1.3 V+.1 | length 11.3
  Top Layer w0.5: v2(132.7,97.475) 132.7,97.45 135.7,97.45 D1.3@137.1,96.05 ; v2@132.806,97.581 ccw(c133.122,97.897) 133.122,97.45 ; 135.82,97.33 ccw(c137.1,98.611) D1.3@137.1,96.8 ; D1.3@136.423,96.727 cw(c135.996,96.3) D1.3@136.6,96.3
  Bottom Layer w0.5: V+.1@129.25,96.05 130.325,96.05 131.75,97.475 v2(132.7,97.475)
NetD2_2: D2.2 R4.1 R5.1 | length 20.4
  Top Layer w0.254: D2.2@132.775,106.655 133.355,106.075 R4.1@136.25,106.075 ; D2.2@132.902,106.655 ccw(c134.119,107.641) 134.119,106.075 ; D2.2@133.099,106.815 ccw(c134.651,108.073) 134.651,106.075 ; D2.2@133.297,106.975 ccw(c135.184,108.505) 135.184,106.075 ; D2.2@133.494,107.135 ccw(c135.717,108.936) 135.717,106.075 ; D2.2@133.62,105.937 cw(c133.955,105.602) D2.2@133.955,106.075 ; D2.2@133.691,107.295 ccw(c136.25,109.368) R4.1@136.25,106.075 ; R4.1@135.972,105.847 ccw(c135.42,105.295) 135.42,106.075 ccw(c135.42,106.855) R4.1@135.972,106.303 ; R5.1@136.022,104.428 ccw(c135.47,104.98) 136.25,104.98 ccw(c137.03,104.98) R5.1@136.478,104.428 ; R4.1@136.022,105.847 cw(c135.47,105.295) 136.25,105.295 cw(c137.03,105.295) R4.1@136.478,105.847 ; R5.1@136.25,104.2 R4.1@136.25,106.075
NetD4_1: D4.1 D5.6 | length 14.5
  Top Layer w0.254: D4.1@125.288,101.785 cw(c124.566,101.063) 125.587,101.063 cw(c126.608,101.063) D4.1@125.886,101.785 ; D4.1@125.587,102.735 125.587,97.013 D5.6@129.527,93.074 ; D5.6@128.644,93.533 ccw(c127.623,93.533) 128.345,94.255 ccw(c129.067,94.977) D5.6@129.067,93.956
NetD4_2: D4.2 D5.5 | length 13.2
  Top Layer w0.254: D4.2@126.901,101.785 cw(c126.179,101.063) 127.2,101.063 cw(c128.221,101.063) D4.2@127.499,101.785 ; D4.2@127.2,102.735 127.2,97.681 D5.5@130.667,94.214 ; D5.5@129.784,94.674 ccw(c128.763,94.674) 129.485,95.396 ccw(c130.207,96.118) D5.5@130.207,95.097
NetD4_3: D4.3 D5.4 | length 14.1
  Top Layer w0.254: D4.3@128.514,101.785 cw(c127.792,101.063) 128.813,101.063 cw(c129.834,101.063) D4.3@129.112,101.785 ; D4.3@128.813,102.735 128.813,97.887 131.345,95.355 D5.4@131.808,95.355 ; 129.837,96.863 ccw(c131.348,98.374) D5.4@131.348,96.237 ; 130.271,96.429 ccw(c131.348,97.507) D5.4@131.348,95.983 ; 130.704,95.996 ccw(c131.348,96.639) D5.4@131.348,95.729
NetD4_4: D4.4 R21.2 | length 16.8
  Top Layer w0.3: D4.4@128.53,106.933 cw(c127.847,106.25) 128.813,106.25 cw(c129.779,106.25) D4.4@129.096,106.933 ; D4.4@128.813,107.865 128.813,106.012 129.6,105.225 131.075,105.225 131.775,104.525 v1(134.6,104.525)
  Bottom Layer w0.3: R21.2@134.005,105.622 cw(c133.272,104.575) v1@134.55,104.575 ; R21.2@134.177,105.868 cw(c133.676,105.151) 134.55,105.151 cw(c135.424,105.151) R21.2@134.923,105.868 ; 134.481,104.831 ccw(c134.831,104.925) v1@134.65,104.612 ; 134.55,104.887 ccw(c134.962,104.887) v1@134.671,104.596 ; R21.2@134.55,106.4 v1@134.55,104.575 ; v1(134.6,104.525) v1@134.55,104.575 ; 134.642,104.917 ccw(c135.077,104.8) v1@134.687,104.575 ; R21.2@135.095,105.622 ccw(c135.828,104.575) v1@134.55,104.575
NetD4_5: D4.5 R19.2 | length 14.6
  Top Layer w0.3: D4.5@126.917,106.933 cw(c126.234,106.25) 127.2,106.25 cw(c128.166,106.25) D4.5@127.483,106.933 ; D4.5@127.2,107.865 127.2,106.075 128.8,104.475 v1(130.8,104.475)
  Bottom Layer w0.3: R19.2@130.213,105.609 cw(c129.4,104.5) 130.775,104.5 cw(c132.15,104.5) R19.2@131.337,105.609 ; R19.2@130.391,105.851 cw(c129.834,105.092) 130.775,105.092 cw(c131.716,105.092) R19.2@131.159,105.851 ; 130.709,104.745 ccw(c131.001,104.823) v1@130.85,104.562 ; 130.775,104.777 ccw(c131.102,104.777) v1@130.871,104.546 ; R19.2@130.775,106.375 130.775,104.5 v1(130.8,104.475) ; 130.852,104.788 ccw(c131.186,104.698) v1@130.887,104.525
NetD4_6: D4.6 R20.2 | length 8
  Top Layer w0.3: D4.6@125.304,106.933 cw(c124.621,106.25) 125.587,106.25 cw(c126.553,106.25) D4.6@125.87,106.933 ; D4.6@125.587,107.865 125.587,106.113 v1(126.775,104.925)
  Bottom Layer w0.3: R20.2@126.362,105.503 cw(c126.159,104.922) v1@126.775,104.922 ; v1@126.775,104.922 cw(c127.536,104.922) R20.2@127.153,105.579 ; v1(126.775,104.925) 126.775,106.25 R20.2@126.925,106.4
NetD5_1: D5.1 R31.1 R32.1 | length 12.2
  Top Layer w0.254: D5.1@133.155,89.445 134.825,87.775 137.7,87.775 137.725,87.75 R31.1@137.725,86.1 ; D5.1@133.614,88.563 cw(c133.614,87.542) 134.336,88.264 cw(c135.058,88.986) D5.1@134.037,88.986 ; 136.81,87.775 ccw(c136.81,88.64) R32.1@137.422,88.028 ; 136.931,87.775 cw(c136.931,87.081) R32.1@137.422,87.572 ; R31.1@137.522,86.353 ccw(c137.031,86.844) 137.725,86.844 ; R32.1@137.522,87.572 cw(c137.031,87.081) 137.725,87.081 ; 137.725,86.96 cw(c138.59,86.96) R32.1@137.978,87.572 ; 137.725,86.965 ccw(c138.59,86.965) R31.1@137.978,86.353
NetD5_2: D5.2 R29.1 R30.1 | length 16.4
  Top Layer w0.254: D5.2@134.295,90.586 135.431,89.45 ; D5.2@134.775,89.704 cw(c134.816,88.835) 135.431,89.45 ; D5.2@135.177,90.106 ccw(c136.046,90.065) 135.431,89.45 ; 136.593,89.45 ccw(c136.593,90.657) R29.1@137.447,89.803 ; 137.197,89.45 cw(c137.197,89.097) R29.1@137.447,89.347 ; 137.207,89.45 ccw(c137.207,90.043) R29.1@137.626,89.624 ; R29.1@137.703,89.89 ccw(c137.494,90.798) 138.284,90.303 ; R29.1@137.775,89.898 ccw(c137.775,90.557) 138.241,90.091 ; R29.1@137.999,89.849 ccw(c136.424,91.425) R30.1@138.652,91.425 ; R29.1@138.09,89.647 cw(c138.702,89.788) 138.17,90.121 ; R29.1@138.098,89.575 cw(c138.999,89.575) 138.362,90.212 ; 138.433,90.283 ccw(c137.291,91.425) R30.1@138.906,91.425 ; 138.867,90.717 ccw(c138.158,91.425) R30.1@139.16,91.425 ; R30.1@138.868,91.143 cw(c138.718,90.875) 139.025,90.875 ; R30.1@139.025,91.425 139.025,90.875 ; R30.1@139.182,91.143 ccw(c139.332,90.875) 139.025,90.875 ; 135.431,89.45 137.7,89.45 137.7,89.55 139.025,90.875
NetD5_3: D5.3 R25.1 R26.1 | length 23.9
  Top Layer w0.254: D5.3@135.436,91.726 v1(136.859,93.15) R26.1@139,93.15 ; D5.3@135.436,92.149 ccw(c135.436,93.171) 136.158,92.449 ccw(c136.88,91.726) D5.3@135.859,91.726 ; v1@136.736,93.15 cw(c136.439,93.15) 136.649,92.94 cw(c136.859,92.73) v1@136.859,93.027 ; v1@136.946,93.063 cw(c137.156,92.853) 137.156,93.15 cw(c137.156,93.447) v1@136.946,93.237 ; R26.1@138.722,92.922 ccw(c138.17,92.37) 138.17,93.15 ccw(c138.17,93.93) R26.1@138.722,93.378
  Mid-Layer 2 w0.254: v1(136.859,93.15) 137.375,93.15 140.325,90.2 v1(147.175,90.2) ; v1@136.946,93.063 cw(c137.156,92.853) 137.156,93.15 cw(c137.156,93.447) v1@136.946,93.237 ; v1@147.088,90.113 ccw(c146.878,89.903) 146.878,90.2 ccw(c146.878,90.497) v1@147.088,90.287
  Bottom Layer w0.254: v1@147.143,90.081 cw(c147.015,89.602) R25.1@147.444,89.85 ; v1@147.175,90.077 cw(c147.175,89.78) 147.385,89.99 cw(c147.595,90.2) v1@147.298,90.2 ; v1(147.175,90.2) R25.1@147.85,89.525 ; v1@147.207,90.081 cw(c147.271,89.841) 147.396,90.056 ; v1@147.213,90.162 ccw(c147.85,90.798) R25.1@147.85,89.898 ; v1@147.294,90.232 ccw(c147.627,90.321) R25.1@147.454,90.023 ; v1@147.334,90.041 cw(c146.868,89.575) R25.1@147.527,89.575
NetD6_1: D6.1 D7.6 | length 18.8
  Top Layer w0.254: D6.1@147.94,85.712 148.303,86.075 153.725,86.075 157.127,89.477 D7.6@157.601,89.477 ; D6.1@148.53,85.772 cw(c149.261,85.041) 149.261,86.075 ; D6.1@148.71,85.593 cw(c149.875,84.428) 149.875,86.075 ; D6.1@148.89,85.413 cw(c150.488,83.815) 150.488,86.075 ; 155.609,87.959 cw(c157.142,86.426) D7.6@157.142,88.594 ; 156.043,88.393 cw(c157.142,87.293) D7.6@157.142,88.848 ; 156.476,88.826 cw(c157.142,88.161) D7.6@157.142,89.102
NetD6_2: D6.2 D7.5 | length 15.1
  Top Layer w0.254: D6.2@147.94,87.325 148.315,87.7 152.708,87.7 154.558,89.55 155.394,89.55 ; D6.2@148.53,87.385 cw(c149.291,86.625) 149.291,87.7 ; D6.2@148.71,87.205 cw(c149.904,86.012) 149.904,87.7 ; D6.2@148.89,87.026 cw(c150.517,85.398) 150.517,87.7 ; D7.5@155.582,90.103 cw(c154.927,90.017) 155.394,89.55 ; D7.5@155.947,89.738 ccw(c155.861,89.083) 155.394,89.55 ; D7.5@156.461,90.617 155.394,89.55
NetD6_3: D6.3 D7.4 | length 11.8
  Top Layer w0.254: D6.3@147.94,88.938 152.501,88.938 D7.4@155.32,91.758 ; D6.3@148.89,88.639 cw(c149.612,87.917) 149.612,88.938 cw(c149.612,89.959) D6.3@148.89,89.237 ; D7.4@154.438,91.298 cw(c153.417,91.298) 154.139,90.576 cw(c154.861,89.854) D7.4@154.861,90.875